# EAGLE board SparkFun_VR_IMU_Breakout_BNO086_QWIIC-Panel (EAGLE 9.6.2), part 1 of 5
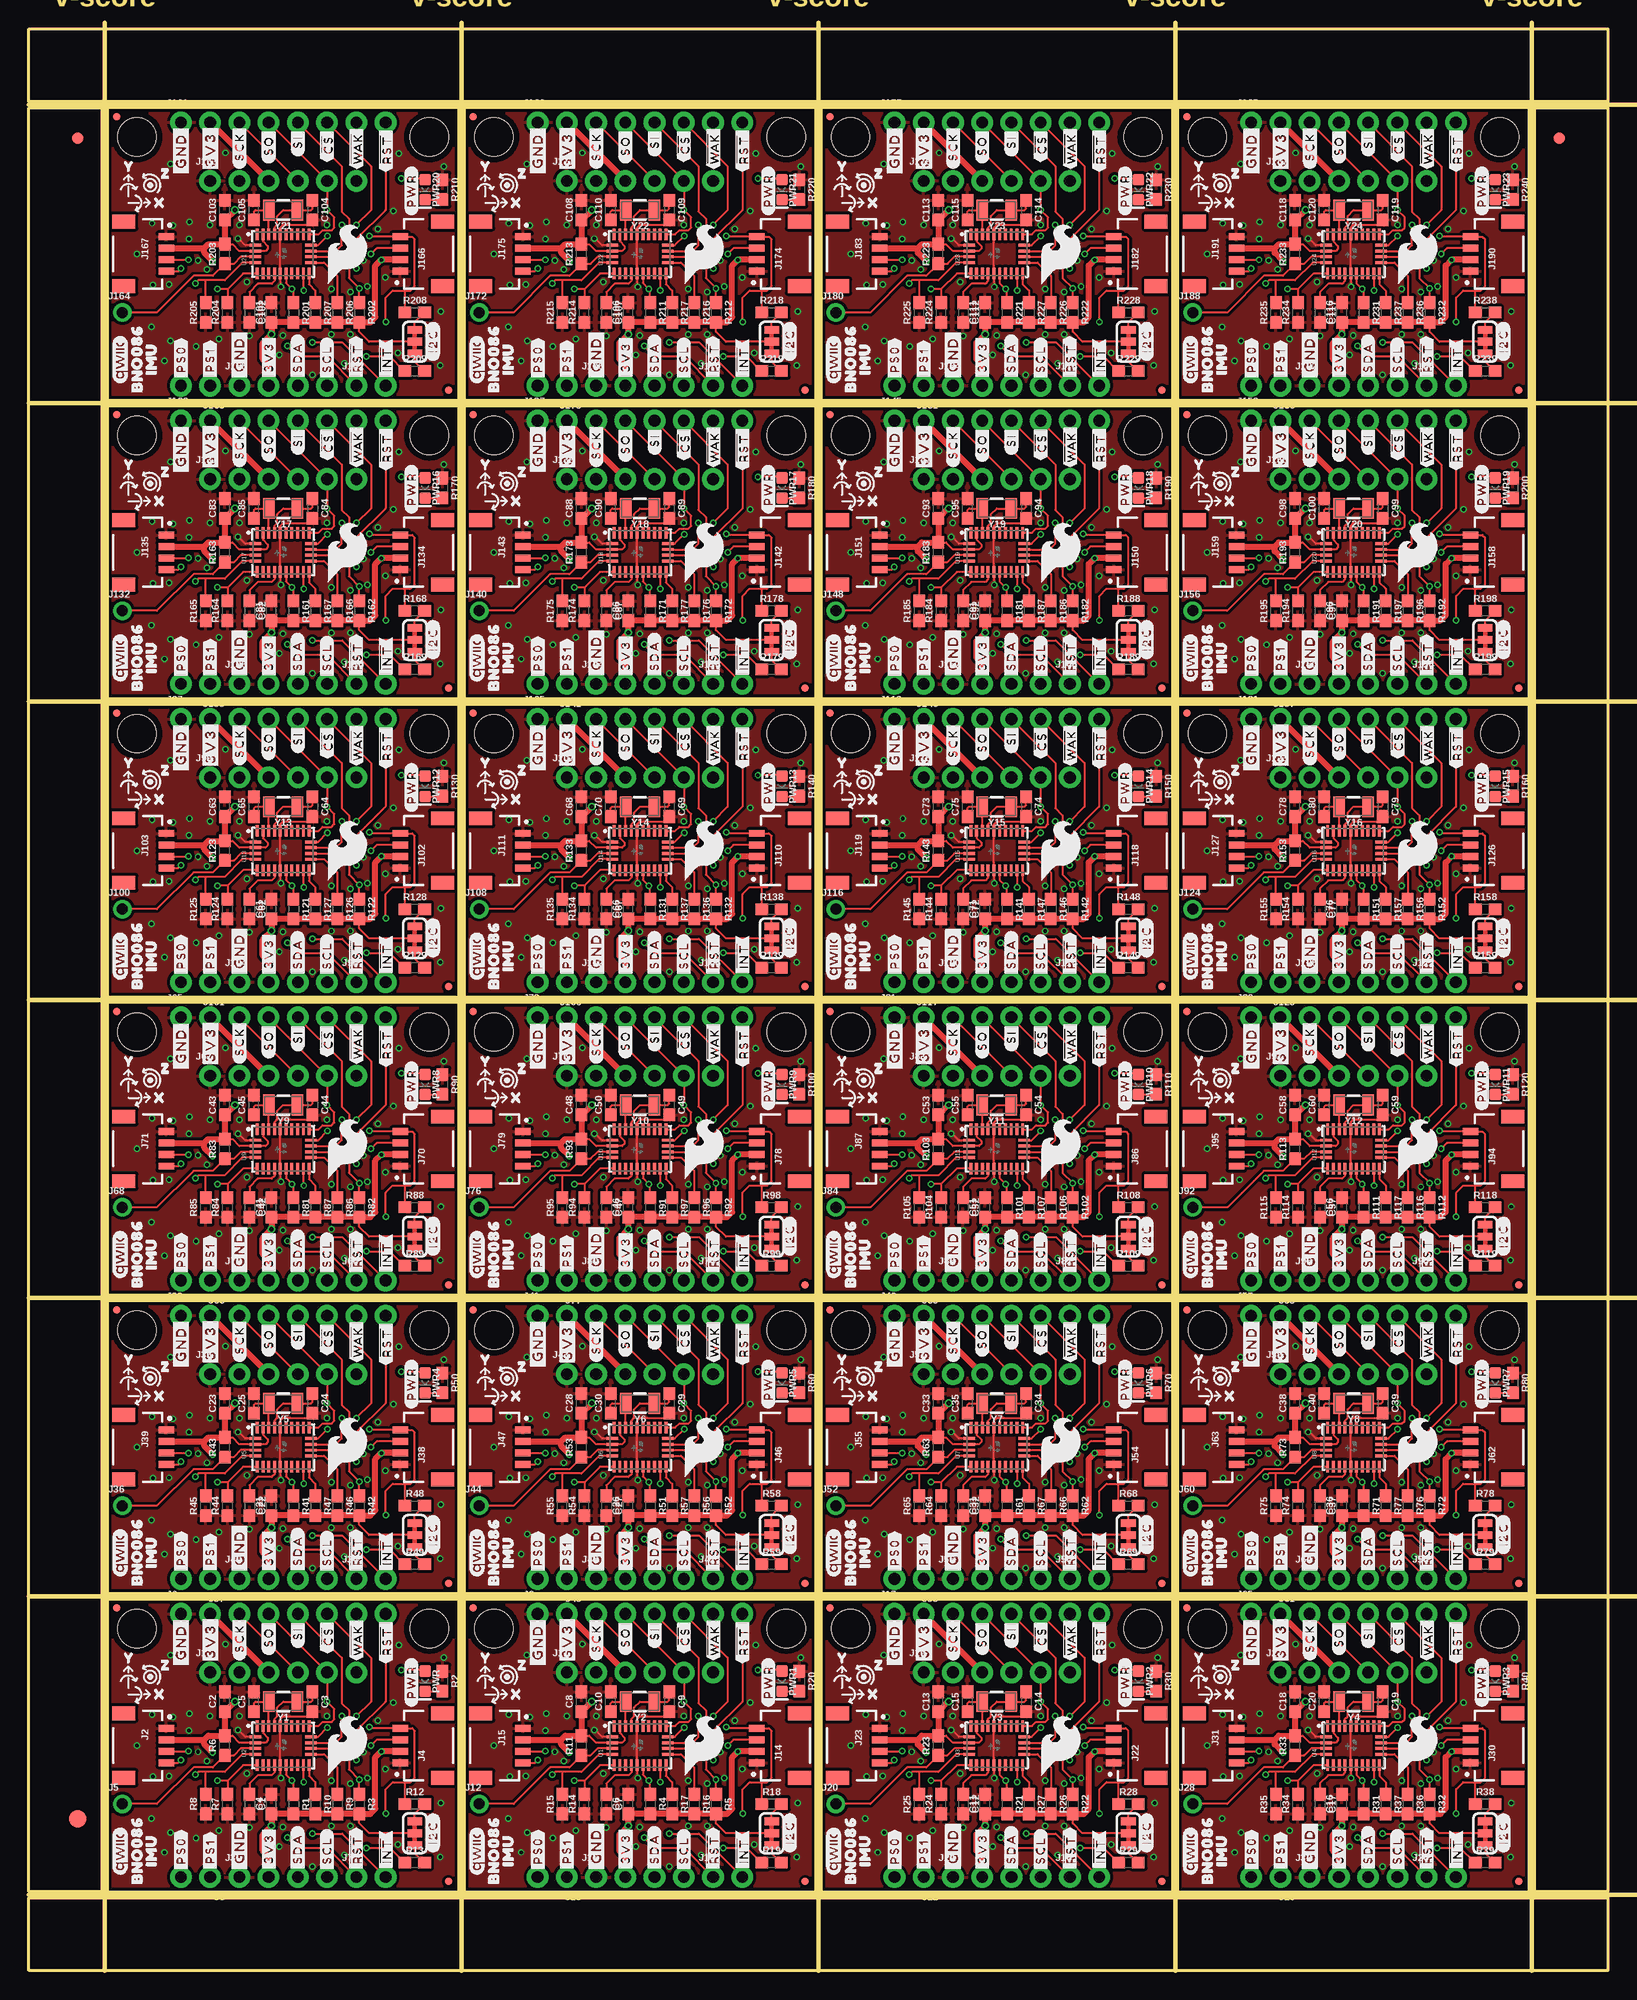
[diagram p0: board, top side]
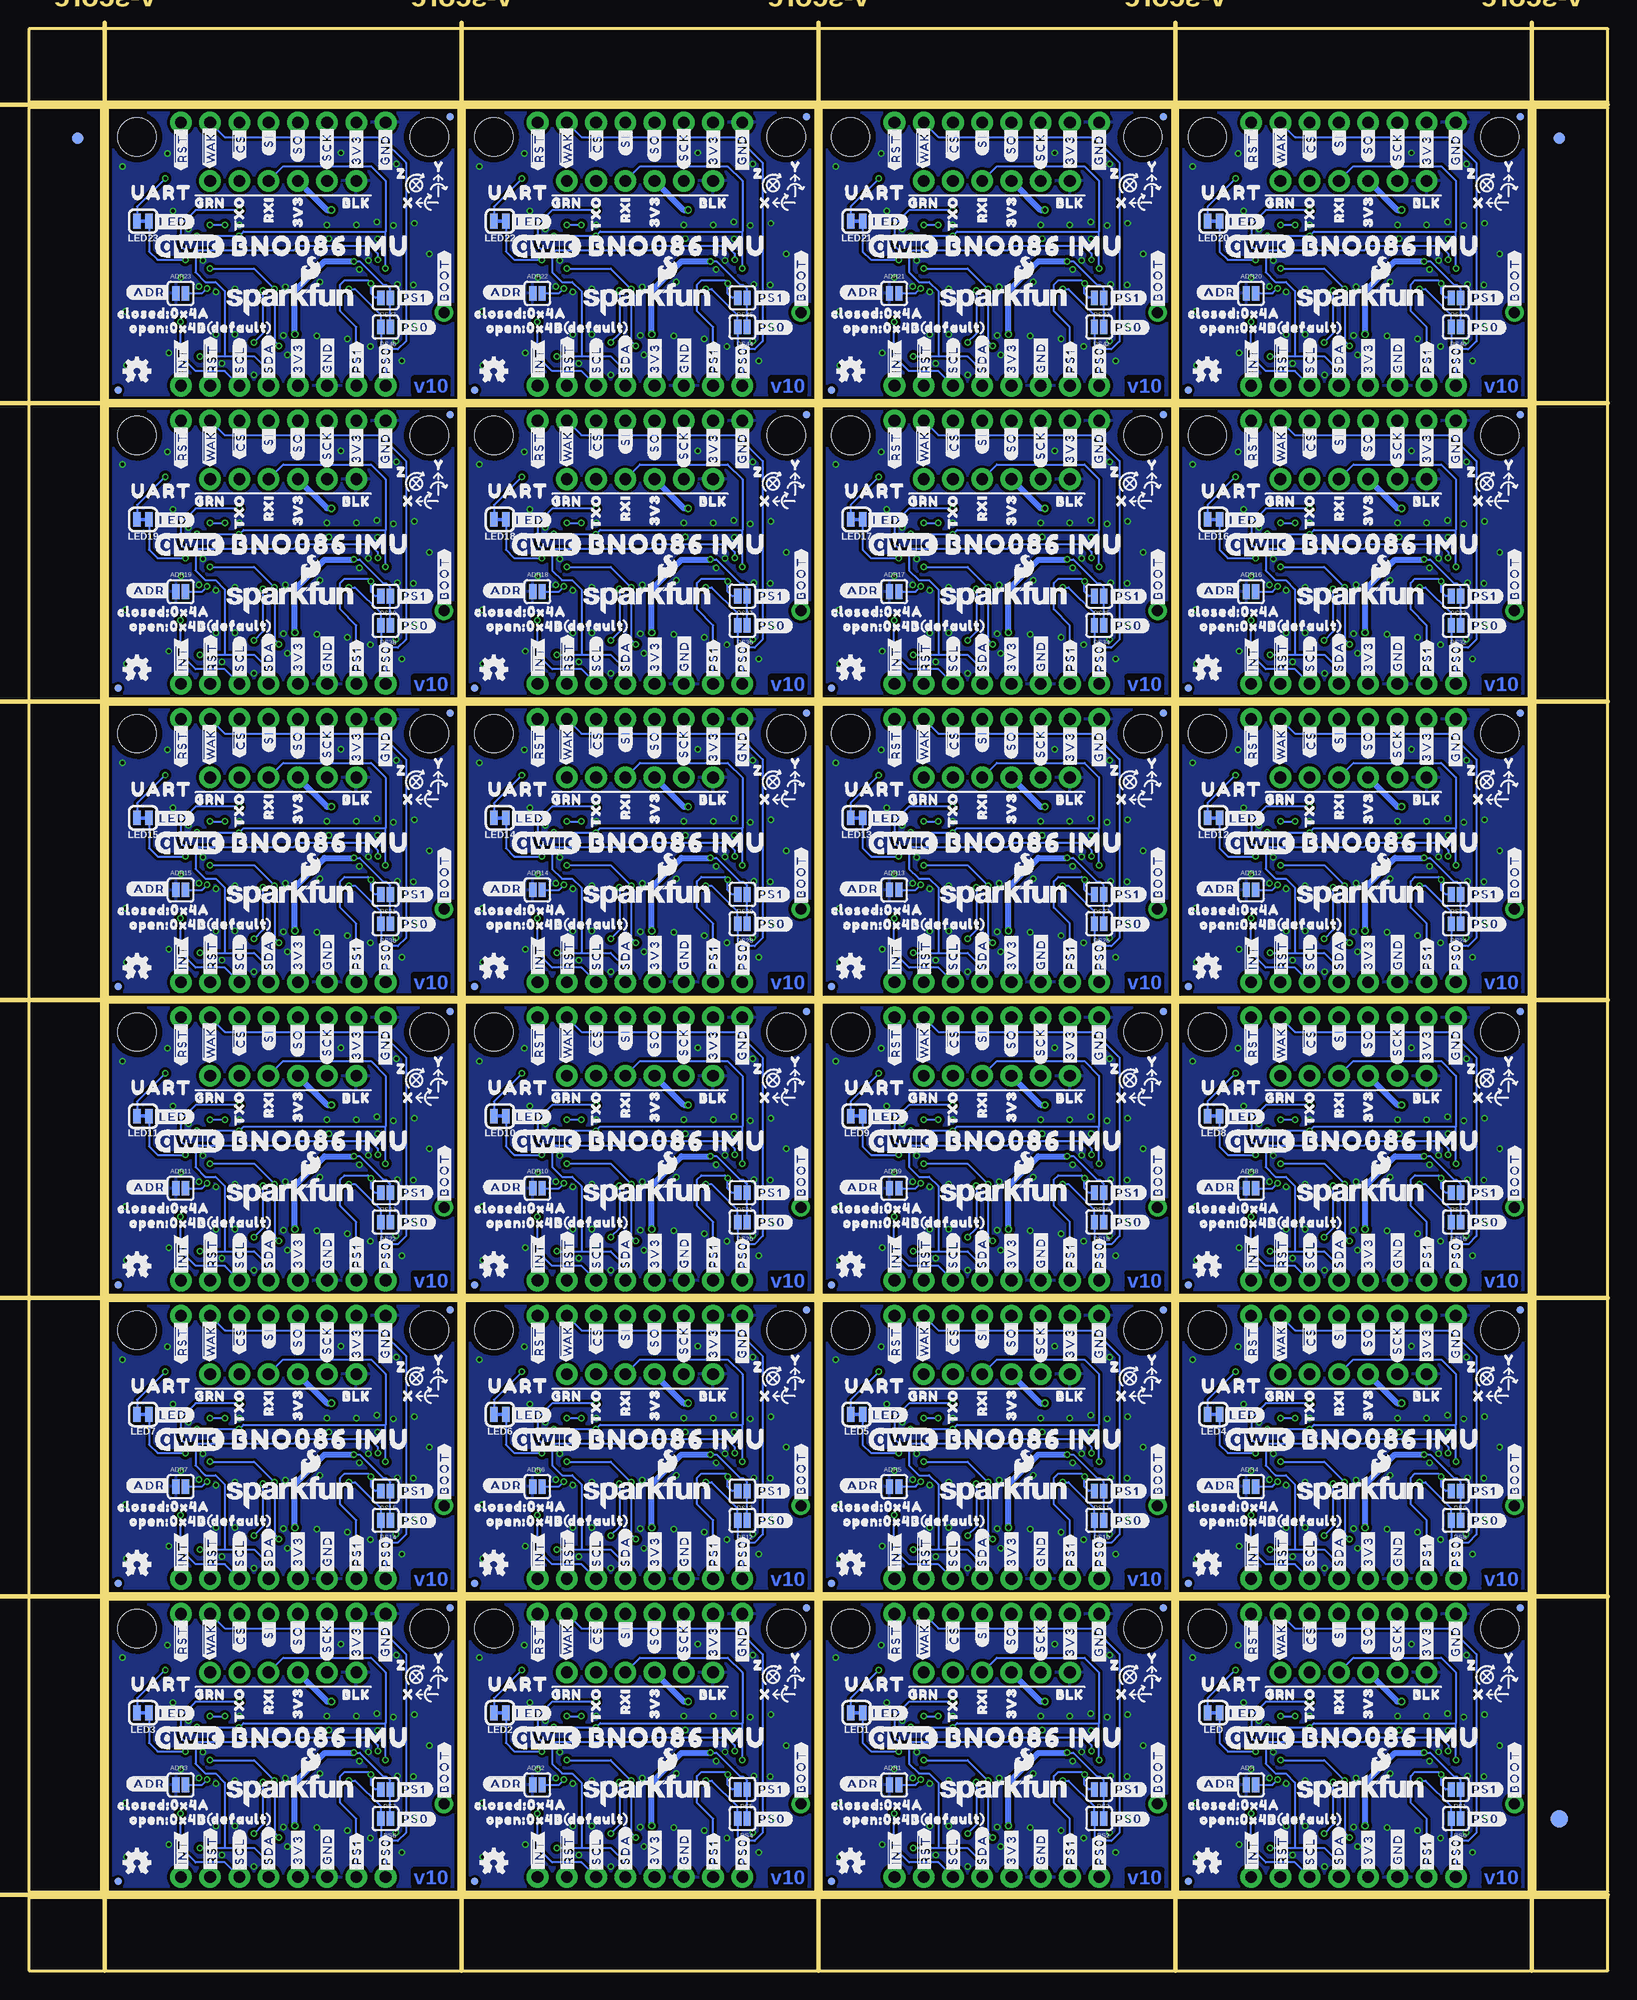
[diagram p1: board, bottom side, seen from below]

Size 137.16 x 168.66 mm. Coordinates in mm from the lower left corner, seen from the top.
Outline: 6.86,6.86 6.86,32.26 37.34,32.26 37.34,6.86 6.86,6.86
Outline: 37.85,6.86 37.85,32.26 68.33,32.26 68.33,6.86 37.85,6.86
Outline: 68.83,6.86 68.83,32.26 99.31,32.26 99.31,6.86 68.83,6.86
Outline: 99.82,6.86 99.82,32.26 130.3,32.26 130.3,6.86 99.82,6.86
Outline: 6.86,32.77 6.86,58.17 37.34,58.17 37.34,32.77 6.86,32.77
Outline: 37.85,32.77 37.85,58.17 68.33,58.17 68.33,32.77 37.85,32.77
Outline: 68.83,32.77 68.83,58.17 99.31,58.17 99.31,32.77 68.83,32.77
Outline: 99.82,32.77 99.82,58.17 130.3,58.17 130.3,32.77 99.82,32.77
Outline: 6.86,58.67 6.86,84.07 37.34,84.07 37.34,58.67 6.86,58.67
Outline: 37.85,58.67 37.85,84.07 68.33,84.07 68.33,58.67 37.85,58.67
Outline: 68.83,58.67 68.83,84.07 99.31,84.07 99.31,58.67 68.83,58.67
Outline: 99.82,58.67 99.82,84.07 130.3,84.07 130.3,58.67 99.82,58.67
Outline: 6.86,84.58 6.86,109.98 37.34,109.98 37.34,84.58 6.86,84.58
Outline: 37.85,84.58 37.85,109.98 68.33,109.98 68.33,84.58 37.85,84.58
Outline: 68.83,84.58 68.83,109.98 99.31,109.98 99.31,84.58 68.83,84.58
Outline: 99.82,84.58 99.82,109.98 130.3,109.98 130.3,84.58 99.82,84.58
Outline: 6.86,110.49 6.86,135.89 37.34,135.89 37.34,110.49 6.86,110.49
Outline: 37.85,110.49 37.85,135.89 68.33,135.89 68.33,110.49 37.85,110.49
Outline: 68.83,110.49 68.83,135.89 99.31,135.89 99.31,110.49 68.83,110.49
Outline: 99.82,110.49 99.82,135.89 130.3,135.89 130.3,110.49 99.82,110.49
Outline: 6.86,136.4 6.86,161.8 37.34,161.8 37.34,136.4 6.86,136.4
Outline: 37.85,136.4 37.85,161.8 68.33,161.8 68.33,136.4 37.85,136.4
Outline: 68.83,136.4 68.83,161.8 99.31,161.8 99.31,136.4 68.83,136.4
Outline: 99.82,136.4 99.82,161.8 130.3,161.8 130.3,136.4 99.82,136.4
Outline: 0,6.35 137.16,6.35 137.16,0 0,0 0,6.35
Outline: 130.81,161.8 137.16,161.8 137.16,6.86 130.81,6.86 130.81,161.8
Outline: 0,168.66 137.16,168.66 137.16,162.31 0,162.31 0,168.66
Outline: 0,161.8 6.35,161.8 6.35,6.86 0,6.86 0,161.8
Copper layers (1*16): Top 0.035mm / dielectric 1.5mm / Bottom 0.035mm
Design rules "SparkFun_VR_IMU_Breakout_BNO086_QWIIC": minimum track width 5mil, minimum drill 0.3mm, track to track 5mil, track to pad 5mil, pad to pad 5mil, via to via 5mil, smd to smd 5mil, copper to edge 7mil, drill to drill 7mil, minimum pad ring 5mil, minimum via ring 5mil, stop-mask expansion 2.5mil, vias tented up to drill 25mil, thermal gap 10mil
Milling: 12 lines

## Footprints (pad centres in the part's own frame; a part is rotated, then mirrored left to right if it is on the bottom)
SMT-JUMPER_2_NO_SILK = smd 0.635 x 1.27: 1 -0.406,0; 2 0.406,0
0603 = smd 1.1 x 1: 1 -0.85,0; 2 0.85,0
FIDUCIAL-1X2 = smd 1 x 1: 1 0,0
FIDUCIAL-1.5X3 = smd 1.5 x 1.5: 1 0,0
SMT-JUMPER_3_2-NC_TRACE_SILK = smd 0.66 x 1.27: 1 -1.041,0; 2 0,0; 3 1.041,0
1X06_NO_SILK = drill 1.016 pad 1.88: 1 0,0; 2 2.54,0; 3 5.08,0; 4 7.62,0; 5 10.16,0; 6 12.7,0
JST04_1MM_RA = smd 0.6 x 1.35: 1 -1.5,0; 2 -0.5,0; 3 0.5,0; 4 1.5,0 | smd 1.2 x 2: NC1 2.8,-3.675; NC2 -2.8,-3.675
1X04_NO_SILK = drill 1.016 pad 1.88: 1 0,0; 2 2.54,0; 3 5.08,0; 4 7.62,0
1X01_NO_SILK = drill 0.95 pad 1.6: 1 0,0
1X08_NO_SILK = drill 1.016 pad 1.88: 1 0,0; 2 2.54,0; 3 5.08,0; 4 7.62,0; 5 10.16,0; 6 12.7,0; 7 15.24,0; 8 17.78,0
1X02_NO_SILK = drill 1.016 pad 1.88: 1 0,0; 2 2.54,0
FIDUCIAL-MICRO = smd 0.635 x 0.635: 1 0,0
STAND-OFF = hole 3.302: 0,0
SMT-JUMPER_2_NC_TRACE_SILK = smd 0.66 x 1.27: 1 -0.521,0; 2 0.521,0
LED-0603 = smd 1 x 1: A -0.877,0; C 0.877,0
LGA-28 = smd 1 x 0.25: 1 1.7,2.25; 6 -1.7,2.25; 7 -1.7,1.75; 8 -1.7,1.25; 9 -1.7,0.75; 10 -1.7,0.25; 11 -1.7,-0.25; 12 -1.7,-0.75; 13 -1.7,-1.25; 14 -1.7,-1.75; 15 -1.7,-2.25; 20 1.7,-2.25; 21 1.7,-1.75; 22 1.7,-1.25; 23 1.7,-0.75; 24 1.7,-0.25; 25 1.7,0.25; 26 1.7,0.75; 27 1.7,1.25; 28 1.7,1.75 | smd 0.25 x 1: 2 0.75,2.4; 3 0.25,2.4; 4 -0.25,2.4; 5 -0.75,2.4; 16 -0.75,-2.4; 17 -0.25,-2.4; 18 0.25,-2.4; 19 0.75,-2.4
CRYSTAL-SMD-3.2X1.5MM = smd 1 x 1.8: P$1 -1.25,0; P$2 1.25,0

## Placement (x,y rotation side)
ADR  [SMT-JUMPER_2_NO_SILK]  31,16.14 0 bottom
ADR1  [SMT-JUMPER_2_NO_SILK]  61.99,16.14 0 bottom
ADR2  [SMT-JUMPER_2_NO_SILK]  92.98,16.14 0 bottom
ADR3  [SMT-JUMPER_2_NO_SILK]  123.97,16.14 0 bottom
ADR4  [SMT-JUMPER_2_NO_SILK]  31,42.05 0 bottom
ADR5  [SMT-JUMPER_2_NO_SILK]  61.99,42.05 0 bottom
ADR6  [SMT-JUMPER_2_NO_SILK]  92.98,42.05 0 bottom
ADR7  [SMT-JUMPER_2_NO_SILK]  123.97,42.05 0 bottom
ADR8  [SMT-JUMPER_2_NO_SILK]  31,67.96 0 bottom
ADR9  [SMT-JUMPER_2_NO_SILK]  61.99,67.96 0 bottom
ADR10  [SMT-JUMPER_2_NO_SILK]  92.98,67.96 0 bottom
ADR11  [SMT-JUMPER_2_NO_SILK]  123.97,67.96 0 bottom
ADR12  [SMT-JUMPER_2_NO_SILK]  31,93.87 0 bottom
ADR13  [SMT-JUMPER_2_NO_SILK]  61.99,93.87 0 bottom
ADR14  [SMT-JUMPER_2_NO_SILK]  92.98,93.87 0 bottom
ADR15  [SMT-JUMPER_2_NO_SILK]  123.97,93.87 0 bottom
ADR16  [SMT-JUMPER_2_NO_SILK]  31,119.77 0 bottom
ADR17  [SMT-JUMPER_2_NO_SILK]  61.99,119.77 0 bottom
ADR18  [SMT-JUMPER_2_NO_SILK]  92.98,119.77 0 bottom
ADR19  [SMT-JUMPER_2_NO_SILK]  123.97,119.77 0 bottom
ADR20  [SMT-JUMPER_2_NO_SILK]  31,145.68 0 bottom
ADR21  [SMT-JUMPER_2_NO_SILK]  61.99,145.68 0 bottom
ADR22  [SMT-JUMPER_2_NO_SILK]  92.98,145.68 0 bottom
ADR23  [SMT-JUMPER_2_NO_SILK]  123.97,145.68 0 bottom
C1  0.1uF  [0603]  19.18,14.48 270 top
C2  0.1uF  [0603]  17.02,23.37 90 top
C3  22pF  [0603]  24.64,23.37 270 top
C4  0.1uF  [0603]  21.08,14.48 90 top
C5  22pF  [0603]  19.56,23.37 90 top
C6  0.1uF  [0603]  52.07,14.48 90 top
C7  0.1uF  [0603]  50.16,14.48 270 top
C8  0.1uF  [0603]  48.01,23.37 90 top
C9  22pF  [0603]  55.63,23.37 270 top
C10  22pF  [0603]  50.55,23.37 90 top
C11  0.1uF  [0603]  83.06,14.48 90 top
C12  0.1uF  [0603]  81.15,14.48 270 top
C13  0.1uF  [0603]  78.99,23.37 90 top
C14  22pF  [0603]  86.61,23.37 270 top
C15  22pF  [0603]  81.53,23.37 90 top
C16  0.1uF  [0603]  114.05,14.48 90 top
C17  0.1uF  [0603]  112.14,14.48 270 top
C18  0.1uF  [0603]  109.98,23.37 90 top
C19  22pF  [0603]  117.6,23.37 270 top
C20  22pF  [0603]  112.52,23.37 90 top
C21  0.1uF  [0603]  21.08,40.39 90 top
C22  0.1uF  [0603]  19.18,40.39 270 top
C23  0.1uF  [0603]  17.02,49.28 90 top
C24  22pF  [0603]  24.64,49.28 270 top
C25  22pF  [0603]  19.56,49.28 90 top
C26  0.1uF  [0603]  52.07,40.39 90 top
C27  0.1uF  [0603]  50.16,40.39 270 top
C28  0.1uF  [0603]  48.01,49.28 90 top
C29  22pF  [0603]  55.63,49.28 270 top
C30  22pF  [0603]  50.55,49.28 90 top
C31  0.1uF  [0603]  83.06,40.39 90 top
C32  0.1uF  [0603]  81.15,40.39 270 top
C33  0.1uF  [0603]  78.99,49.28 90 top
C34  22pF  [0603]  86.61,49.28 270 top
C35  22pF  [0603]  81.53,49.28 90 top
C36  0.1uF  [0603]  114.05,40.39 90 top
C37  0.1uF  [0603]  112.14,40.39 270 top
C38  0.1uF  [0603]  109.98,49.28 90 top
C39  22pF  [0603]  117.6,49.28 270 top
C40  22pF  [0603]  112.52,49.28 90 top
C41  0.1uF  [0603]  21.08,66.29 90 top
C42  0.1uF  [0603]  19.18,66.29 270 top
C43  0.1uF  [0603]  17.02,75.18 90 top
C44  22pF  [0603]  24.64,75.18 270 top
C45  22pF  [0603]  19.56,75.18 90 top
C46  0.1uF  [0603]  52.07,66.29 90 top
C47  0.1uF  [0603]  50.16,66.29 270 top
C48  0.1uF  [0603]  48.01,75.18 90 top
C49  22pF  [0603]  55.63,75.18 270 top
C50  22pF  [0603]  50.55,75.18 90 top
C51  0.1uF  [0603]  83.06,66.29 90 top
C52  0.1uF  [0603]  81.15,66.29 270 top
C53  0.1uF  [0603]  78.99,75.18 90 top
C54  22pF  [0603]  86.61,75.18 270 top
C55  22pF  [0603]  81.53,75.18 90 top
C56  0.1uF  [0603]  114.05,66.29 90 top
C57  0.1uF  [0603]  112.14,66.29 270 top
C58  0.1uF  [0603]  109.98,75.18 90 top
C59  22pF  [0603]  117.6,75.18 270 top
C60  22pF  [0603]  112.52,75.18 90 top
C61  0.1uF  [0603]  21.08,92.2 90 top
C62  0.1uF  [0603]  19.18,92.2 270 top
C63  0.1uF  [0603]  17.02,101.09 90 top
C64  22pF  [0603]  24.64,101.09 270 top
C65  22pF  [0603]  19.56,101.09 90 top
C66  0.1uF  [0603]  52.07,92.2 90 top
C67  0.1uF  [0603]  50.16,92.2 270 top
C68  0.1uF  [0603]  48.01,101.09 90 top
C69  22pF  [0603]  55.63,101.09 270 top
C70  22pF  [0603]  50.55,101.09 90 top
C71  0.1uF  [0603]  83.06,92.2 90 top
C72  0.1uF  [0603]  81.15,92.2 270 top
C73  0.1uF  [0603]  78.99,101.09 90 top
C74  22pF  [0603]  86.61,101.09 270 top
C75  22pF  [0603]  81.53,101.09 90 top
C76  0.1uF  [0603]  114.05,92.2 90 top
C77  0.1uF  [0603]  112.14,92.2 270 top
C78  0.1uF  [0603]  109.98,101.09 90 top
C79  22pF  [0603]  117.6,101.09 270 top
C80  22pF  [0603]  112.52,101.09 90 top
C81  0.1uF  [0603]  21.08,118.11 90 top
C82  0.1uF  [0603]  19.18,118.11 270 top
C83  0.1uF  [0603]  17.02,127 90 top
C84  22pF  [0603]  24.64,127 270 top
C85  22pF  [0603]  19.56,127 90 top
C86  0.1uF  [0603]  52.07,118.11 90 top
C87  0.1uF  [0603]  50.16,118.11 270 top
C88  0.1uF  [0603]  48.01,127 90 top
C89  22pF  [0603]  55.63,127 270 top
C90  22pF  [0603]  50.55,127 90 top
C91  0.1uF  [0603]  83.06,118.11 90 top
C92  0.1uF  [0603]  81.15,118.11 270 top
C93  0.1uF  [0603]  78.99,127 90 top
C94  22pF  [0603]  86.61,127 270 top
C95  22pF  [0603]  81.53,127 90 top
C96  0.1uF  [0603]  114.05,118.11 90 top
C97  0.1uF  [0603]  112.14,118.11 270 top
C98  0.1uF  [0603]  109.98,127 90 top
C99  22pF  [0603]  117.6,127 270 top
C100  22pF  [0603]  112.52,127 90 top
C101  0.1uF  [0603]  21.08,144.02 90 top
C102  0.1uF  [0603]  19.18,144.02 270 top
C103  0.1uF  [0603]  17.02,152.91 90 top
C104  22pF  [0603]  24.64,152.91 270 top
C105  22pF  [0603]  19.56,152.91 90 top
C106  0.1uF  [0603]  52.07,144.02 90 top
C107  0.1uF  [0603]  50.16,144.02 270 top
C108  0.1uF  [0603]  48.01,152.91 90 top
C109  22pF  [0603]  55.63,152.91 270 top
C110  22pF  [0603]  50.55,152.91 90 top
C111  0.1uF  [0603]  83.06,144.02 90 top
C112  0.1uF  [0603]  81.15,144.02 270 top
C113  0.1uF  [0603]  78.99,152.91 90 top
C114  22pF  [0603]  86.61,152.91 270 top
C115  22pF  [0603]  81.53,152.91 90 top
C116  0.1uF  [0603]  114.05,144.02 90 top
C117  0.1uF  [0603]  112.14,144.02 270 top
C118  0.1uF  [0603]  109.98,152.91 90 top
C119  22pF  [0603]  117.6,152.91 270 top
C120  22pF  [0603]  112.52,152.91 90 top
E$1  [FIDUCIAL-1X2]  4.23,159.13 0 top
E$2  [FIDUCIAL-1X2]  4.23,159.13 0 bottom
E$3  [FIDUCIAL-1X2]  132.93,159.13 0 top
E$4  [FIDUCIAL-1X2]  132.93,159.13 0 bottom
E$5  [FIDUCIAL-1.5X3]  4.23,13.21 0 top
E$6  [FIDUCIAL-1.5X3]  4.23,13.21 0 bottom
I2C  [SMT-JUMPER_3_2-NC_TRACE_SILK]  33.53,11.94 270 top
I2C1  [SMT-JUMPER_3_2-NC_TRACE_SILK]  64.52,11.94 270 top
I2C2  [SMT-JUMPER_3_2-NC_TRACE_SILK]  95.5,11.94 270 top
I2C3  [SMT-JUMPER_3_2-NC_TRACE_SILK]  126.49,11.94 270 top
I2C4  [SMT-JUMPER_3_2-NC_TRACE_SILK]  33.53,37.85 270 top
I2C5  [SMT-JUMPER_3_2-NC_TRACE_SILK]  64.52,37.85 270 top
I2C6  [SMT-JUMPER_3_2-NC_TRACE_SILK]  95.5,37.85 270 top
I2C7  [SMT-JUMPER_3_2-NC_TRACE_SILK]  126.49,37.85 270 top
I2C8  [SMT-JUMPER_3_2-NC_TRACE_SILK]  33.53,63.75 270 top
I2C9  [SMT-JUMPER_3_2-NC_TRACE_SILK]  64.52,63.75 270 top
I2C10  [SMT-JUMPER_3_2-NC_TRACE_SILK]  95.5,63.75 270 top
I2C11  [SMT-JUMPER_3_2-NC_TRACE_SILK]  126.49,63.75 270 top
I2C12  [SMT-JUMPER_3_2-NC_TRACE_SILK]  33.53,89.66 270 top
I2C13  [SMT-JUMPER_3_2-NC_TRACE_SILK]  64.52,89.66 270 top
I2C14  [SMT-JUMPER_3_2-NC_TRACE_SILK]  95.5,89.66 270 top
I2C15  [SMT-JUMPER_3_2-NC_TRACE_SILK]  126.49,89.66 270 top
I2C16  [SMT-JUMPER_3_2-NC_TRACE_SILK]  33.53,115.57 270 top
I2C17  [SMT-JUMPER_3_2-NC_TRACE_SILK]  64.52,115.57 270 top
I2C18  [SMT-JUMPER_3_2-NC_TRACE_SILK]  95.5,115.57 270 top
I2C19  [SMT-JUMPER_3_2-NC_TRACE_SILK]  126.49,115.57 270 top
I2C20  [SMT-JUMPER_3_2-NC_TRACE_SILK]  33.53,141.48 270 top
I2C21  [SMT-JUMPER_3_2-NC_TRACE_SILK]  64.52,141.48 270 top
I2C22  [SMT-JUMPER_3_2-NC_TRACE_SILK]  95.5,141.48 270 top
I2C23  [SMT-JUMPER_3_2-NC_TRACE_SILK]  126.49,141.48 270 top
J1  [1X06_NO_SILK]  15.75,25.91 0 top
J2  SMD  [JST04_1MM_RA]  11.94,19.56 270 top
J3  PTH  [1X04_NO_SILK]  18.29,8.13 0 top
J4  SMD  [JST04_1MM_RA]  32.26,19.56 90 top
J5  [1X01_NO_SILK]  8.13,14.48 0 top
J6  SPI  [1X08_NO_SILK]  13.21,30.99 0 top
J7  [1X02_NO_SILK]  28.45,8.13 0 top
J8  [1X02_NO_SILK]  15.75,8.13 180 top
J9  SPI  [1X08_NO_SILK]  44.2,30.99 0 top
J10  [1X02_NO_SILK]  59.44,8.13 0 top
J11  [1X06_NO_SILK]  46.74,25.91 0 top
J12  [1X01_NO_SILK]  39.12,14.48 0 top
J13  [1X02_NO_SILK]  46.74,8.13 180 top
J14  SMD  [JST04_1MM_RA]  63.25,19.56 90 top
J15  SMD  [JST04_1MM_RA]  42.93,19.56 270 top
J16  PTH  [1X04_NO_SILK]  49.28,8.13 0 top
J17  SPI  [1X08_NO_SILK]  75.18,30.99 0 top
J18  [1X02_NO_SILK]  90.42,8.13 0 top
J19  [1X06_NO_SILK]  77.72,25.91 0 top
J20  [1X01_NO_SILK]  70.1,14.48 0 top
J21  [1X02_NO_SILK]  77.72,8.13 180 top
J22  SMD  [JST04_1MM_RA]  94.23,19.56 90 top
J23  SMD  [JST04_1MM_RA]  73.91,19.56 270 top
J24  PTH  [1X04_NO_SILK]  80.26,8.13 0 top
J25  SPI  [1X08_NO_SILK]  106.17,30.99 0 top
J26  [1X02_NO_SILK]  121.41,8.13 0 top
J27  [1X06_NO_SILK]  108.71,25.91 0 top
J28  [1X01_NO_SILK]  101.09,14.48 0 top
J29  [1X02_NO_SILK]  108.71,8.13 180 top
J30  SMD  [JST04_1MM_RA]  125.22,19.56 90 top
J31  SMD  [JST04_1MM_RA]  104.9,19.56 270 top
J32  PTH  [1X04_NO_SILK]  111.25,8.13 0 top
J33  SPI  [1X08_NO_SILK]  13.21,56.9 0 top
J34  [1X02_NO_SILK]  28.45,34.04 0 top
J35  [1X06_NO_SILK]  15.75,51.82 0 top
J36  [1X01_NO_SILK]  8.13,40.39 0 top
J37  [1X02_NO_SILK]  15.75,34.04 180 top
J38  SMD  [JST04_1MM_RA]  32.26,45.47 90 top
J39  SMD  [JST04_1MM_RA]  11.94,45.47 270 top
J40  PTH  [1X04_NO_SILK]  18.29,34.04 0 top
J41  SPI  [1X08_NO_SILK]  44.2,56.9 0 top
J42  [1X02_NO_SILK]  59.44,34.04 0 top
J43  [1X06_NO_SILK]  46.74,51.82 0 top
J44  [1X01_NO_SILK]  39.12,40.39 0 top
J45  [1X02_NO_SILK]  46.74,34.04 180 top
J46  SMD  [JST04_1MM_RA]  63.25,45.47 90 top
J47  SMD  [JST04_1MM_RA]  42.93,45.47 270 top
J48  PTH  [1X04_NO_SILK]  49.28,34.04 0 top
J49  SPI  [1X08_NO_SILK]  75.18,56.9 0 top
J50  [1X02_NO_SILK]  90.42,34.04 0 top
J51  [1X06_NO_SILK]  77.72,51.82 0 top
J52  [1X01_NO_SILK]  70.1,40.39 0 top
J53  [1X02_NO_SILK]  77.72,34.04 180 top
J54  SMD  [JST04_1MM_RA]  94.23,45.47 90 top
J55  SMD  [JST04_1MM_RA]  73.91,45.47 270 top
J56  PTH  [1X04_NO_SILK]  80.26,34.04 0 top
J57  SPI  [1X08_NO_SILK]  106.17,56.9 0 top
J58  [1X02_NO_SILK]  121.41,34.04 0 top
J59  [1X06_NO_SILK]  108.71,51.82 0 top
J60  [1X01_NO_SILK]  101.09,40.39 0 top
J61  [1X02_NO_SILK]  108.71,34.04 180 top
J62  SMD  [JST04_1MM_RA]  125.22,45.47 90 top
J63  SMD  [JST04_1MM_RA]  104.9,45.47 270 top
J64  PTH  [1X04_NO_SILK]  111.25,34.04 0 top
J65  SPI  [1X08_NO_SILK]  13.21,82.8 0 top
J66  [1X02_NO_SILK]  28.45,59.94 0 top
J67  [1X06_NO_SILK]  15.75,77.72 0 top
J68  [1X01_NO_SILK]  8.13,66.29 0 top
J69  [1X02_NO_SILK]  15.75,59.94 180 top
J70  SMD  [JST04_1MM_RA]  32.26,71.37 90 top
J71  SMD  [JST04_1MM_RA]  11.94,71.37 270 top
J72  PTH  [1X04_NO_SILK]  18.29,59.94 0 top
J73  SPI  [1X08_NO_SILK]  44.2,82.8 0 top
J74  [1X02_NO_SILK]  59.44,59.94 0 top
J75  [1X06_NO_SILK]  46.74,77.72 0 top
J76  [1X01_NO_SILK]  39.12,66.29 0 top
J77  [1X02_NO_SILK]  46.74,59.94 180 top
J78  SMD  [JST04_1MM_RA]  63.25,71.37 90 top
J79  SMD  [JST04_1MM_RA]  42.93,71.37 270 top
J80  PTH  [1X04_NO_SILK]  49.28,59.94 0 top
J81  SPI  [1X08_NO_SILK]  75.18,82.8 0 top
J82  [1X02_NO_SILK]  90.42,59.94 0 top
J83  [1X06_NO_SILK]  77.72,77.72 0 top
J84  [1X01_NO_SILK]  70.1,66.29 0 top
J85  [1X02_NO_SILK]  77.72,59.94 180 top
J86  SMD  [JST04_1MM_RA]  94.23,71.37 90 top
J87  SMD  [JST04_1MM_RA]  73.91,71.37 270 top
J88  PTH  [1X04_NO_SILK]  80.26,59.94 0 top
J89  SPI  [1X08_NO_SILK]  106.17,82.8 0 top
J90  [1X02_NO_SILK]  121.41,59.94 0 top
J91  [1X06_NO_SILK]  108.71,77.72 0 top
J92  [1X01_NO_SILK]  101.09,66.29 0 top
J93  [1X02_NO_SILK]  108.71,59.94 180 top
J94  SMD  [JST04_1MM_RA]  125.22,71.37 90 top
J95  SMD  [JST04_1MM_RA]  104.9,71.37 270 top
J96  PTH  [1X04_NO_SILK]  111.25,59.94 0 top
J97  SPI  [1X08_NO_SILK]  13.21,108.71 0 top
J98  [1X02_NO_SILK]  28.45,85.85 0 top
J99  [1X06_NO_SILK]  15.75,103.63 0 top
J100  [1X01_NO_SILK]  8.13,92.2 0 top
J101  [1X02_NO_SILK]  15.75,85.85 180 top
J102  SMD  [JST04_1MM_RA]  32.26,97.28 90 top
J103  SMD  [JST04_1MM_RA]  11.94,97.28 270 top
J104  PTH  [1X04_NO_SILK]  18.29,85.85 0 top
J105  SPI  [1X08_NO_SILK]  44.2,108.71 0 top
J106  [1X02_NO_SILK]  59.44,85.85 0 top
J107  [1X06_NO_SILK]  46.74,103.63 0 top
J108  [1X01_NO_SILK]  39.12,92.2 0 top
J109  [1X02_NO_SILK]  46.74,85.85 180 top
J110  SMD  [JST04_1MM_RA]  63.25,97.28 90 top
J111  SMD  [JST04_1MM_RA]  42.93,97.28 270 top
J112  PTH  [1X04_NO_SILK]  49.28,85.85 0 top
J113  SPI  [1X08_NO_SILK]  75.18,108.71 0 top
J114  [1X02_NO_SILK]  90.42,85.85 0 top
J115  [1X06_NO_SILK]  77.72,103.63 0 top
J116  [1X01_NO_SILK]  70.1,92.2 0 top
J117  [1X02_NO_SILK]  77.72,85.85 180 top
J118  SMD  [JST04_1MM_RA]  94.23,97.28 90 top
J119  SMD  [JST04_1MM_RA]  73.91,97.28 270 top
J120  PTH  [1X04_NO_SILK]  80.26,85.85 0 top
J121  SPI  [1X08_NO_SILK]  106.17,108.71 0 top
J122  [1X02_NO_SILK]  121.41,85.85 0 top
J123  [1X06_NO_SILK]  108.71,103.63 0 top
J124  [1X01_NO_SILK]  101.09,92.2 0 top
J125  [1X02_NO_SILK]  108.71,85.85 180 top
J126  SMD  [JST04_1MM_RA]  125.22,97.28 90 top
J127  SMD  [JST04_1MM_RA]  104.9,97.28 270 top
J128  PTH  [1X04_NO_SILK]  111.25,85.85 0 top
J129  SPI  [1X08_NO_SILK]  13.21,134.62 0 top
J130  [1X02_NO_SILK]  28.45,111.76 0 top
J131  [1X06_NO_SILK]  15.75,129.54 0 top
J132  [1X01_NO_SILK]  8.13,118.11 0 top
J133  [1X02_NO_SILK]  15.75,111.76 180 top
J134  SMD  [JST04_1MM_RA]  32.26,123.19 90 top
J135  SMD  [JST04_1MM_RA]  11.94,123.19 270 top
J136  PTH  [1X04_NO_SILK]  18.29,111.76 0 top
J137  SPI  [1X08_NO_SILK]  44.2,134.62 0 top
J138  [1X02_NO_SILK]  59.44,111.76 0 top
J139  [1X06_NO_SILK]  46.74,129.54 0 top
J140  [1X01_NO_SILK]  39.12,118.11 0 top
J141  [1X02_NO_SILK]  46.74,111.76 180 top
J142  SMD  [JST04_1MM_RA]  63.25,123.19 90 top
J143  SMD  [JST04_1MM_RA]  42.93,123.19 270 top
J144  PTH  [1X04_NO_SILK]  49.28,111.76 0 top
J145  SPI  [1X08_NO_SILK]  75.18,134.62 0 top
J146  [1X02_NO_SILK]  90.42,111.76 0 top
J147  [1X06_NO_SILK]  77.72,129.54 0 top
J148  [1X01_NO_SILK]  70.1,118.11 0 top
J149  [1X02_NO_SILK]  77.72,111.76 180 top
J150  SMD  [JST04_1MM_RA]  94.23,123.19 90 top
J151  SMD  [JST04_1MM_RA]  73.91,123.19 270 top
J152  PTH  [1X04_NO_SILK]  80.26,111.76 0 top
J153  SPI  [1X08_NO_SILK]  106.17,134.62 0 top
J154  [1X02_NO_SILK]  121.41,111.76 0 top
J155  [1X06_NO_SILK]  108.71,129.54 0 top
J156  [1X01_NO_SILK]  101.09,118.11 0 top
J157  [1X02_NO_SILK]  108.71,111.76 180 top
J158  SMD  [JST04_1MM_RA]  125.22,123.19 90 top
J159  SMD  [JST04_1MM_RA]  104.9,123.19 270 top
J160  PTH  [1X04_NO_SILK]  111.25,111.76 0 top
J161  SPI  [1X08_NO_SILK]  13.21,160.53 0 top
J162  [1X02_NO_SILK]  28.45,137.67 0 top
J163  [1X06_NO_SILK]  15.75,155.45 0 top
J164  [1X01_NO_SILK]  8.13,144.02 0 top
J165  [1X02_NO_SILK]  15.75,137.67 180 top
J166  SMD  [JST04_1MM_RA]  32.26,149.1 90 top
J167  SMD  [JST04_1MM_RA]  11.94,149.1 270 top
J168  PTH  [1X04_NO_SILK]  18.29,137.67 0 top
J169  SPI  [1X08_NO_SILK]  44.2,160.53 0 top
J170  [1X02_NO_SILK]  59.44,137.67 0 top
J171  [1X06_NO_SILK]  46.74,155.45 0 top
J172  [1X01_NO_SILK]  39.12,144.02 0 top
J173  [1X02_NO_SILK]  46.74,137.67 180 top
J174  SMD  [JST04_1MM_RA]  63.25,149.1 90 top
J175  SMD  [JST04_1MM_RA]  42.93,149.1 270 top
J176  PTH  [1X04_NO_SILK]  49.28,137.67 0 top
J177  SPI  [1X08_NO_SILK]  75.18,160.53 0 top
J178  [1X02_NO_SILK]  90.42,137.67 0 top
J179  [1X06_NO_SILK]  77.72,155.45 0 top
J180  [1X01_NO_SILK]  70.1,144.02 0 top
J181  [1X02_NO_SILK]  77.72,137.67 180 top
J182  SMD  [JST04_1MM_RA]  94.23,149.1 90 top
J183  SMD  [JST04_1MM_RA]  73.91,149.1 270 top
J184  PTH  [1X04_NO_SILK]  80.26,137.67 0 top
J185  SPI  [1X08_NO_SILK]  106.17,160.53 0 top
J186  [1X02_NO_SILK]  121.41,137.67 0 top
J187  [1X06_NO_SILK]  108.71,155.45 0 top
J188  [1X01_NO_SILK]  101.09,144.02 0 top
J189  [1X02_NO_SILK]  108.71,137.67 180 top
J190  SMD  [JST04_1MM_RA]  125.22,149.1 90 top
J191  SMD  [JST04_1MM_RA]  104.9,149.1 270 top
J192  PTH  [1X04_NO_SILK]  111.25,137.67 0 top
JP1  FIDUCIALUFIDUCIAL  [FIDUCIAL-MICRO]  36.45,7.75 0 bottom
JP2  FIDUCIALUFIDUCIAL  [FIDUCIAL-MICRO]  36.45,7.75 0 top
JP3  STAND-OFF  [STAND-OFF]  9.4,29.72 0 top
JP4  STAND-OFF  [STAND-OFF]  34.8,29.72 0 top
JP5  FIDUCIALUFIDUCIAL  [FIDUCIAL-MICRO]  7.62,31.5 0 bottom
JP6  FIDUCIALUFIDUCIAL  [FIDUCIAL-MICRO]  7.62,31.5 0 top
JP7  STAND-OFF  [STAND-OFF]  40.39,29.72 0 top
JP8  STAND-OFF  [STAND-OFF]  65.79,29.72 0 top
JP9  FIDUCIALUFIDUCIAL  [FIDUCIAL-MICRO]  67.44,7.75 0 top
JP10  FIDUCIALUFIDUCIAL  [FIDUCIAL-MICRO]  38.61,31.5 0 top
JP11  FIDUCIALUFIDUCIAL  [FIDUCIAL-MICRO]  67.44,7.75 0 bottom
JP12  FIDUCIALUFIDUCIAL  [FIDUCIAL-MICRO]  38.61,31.5 0 bottom
JP13  STAND-OFF  [STAND-OFF]  71.37,29.72 0 top
JP14  STAND-OFF  [STAND-OFF]  96.77,29.72 0 top
JP15  FIDUCIALUFIDUCIAL  [FIDUCIAL-MICRO]  98.42,7.75 0 top
JP16  FIDUCIALUFIDUCIAL  [FIDUCIAL-MICRO]  69.6,31.5 0 top
JP17  FIDUCIALUFIDUCIAL  [FIDUCIAL-MICRO]  98.42,7.75 0 bottom
JP18  FIDUCIALUFIDUCIAL  [FIDUCIAL-MICRO]  69.6,31.5 0 bottom
JP19  STAND-OFF  [STAND-OFF]  102.36,29.72 0 top
JP20  STAND-OFF  [STAND-OFF]  127.76,29.72 0 top
JP21  FIDUCIALUFIDUCIAL  [FIDUCIAL-MICRO]  129.41,7.75 0 top
JP22  FIDUCIALUFIDUCIAL  [FIDUCIAL-MICRO]  100.58,31.5 0 top
JP23  FIDUCIALUFIDUCIAL  [FIDUCIAL-MICRO]  129.41,7.75 0 bottom
JP24  FIDUCIALUFIDUCIAL  [FIDUCIAL-MICRO]  100.58,31.5 0 bottom
JP25  STAND-OFF  [STAND-OFF]  9.4,55.63 0 top
JP26  STAND-OFF  [STAND-OFF]  34.8,55.63 0 top
JP27  FIDUCIALUFIDUCIAL  [FIDUCIAL-MICRO]  36.45,33.66 0 top
JP28  FIDUCIALUFIDUCIAL  [FIDUCIAL-MICRO]  7.62,57.4 0 top
JP29  FIDUCIALUFIDUCIAL  [FIDUCIAL-MICRO]  36.45,33.66 0 bottom
JP30  FIDUCIALUFIDUCIAL  [FIDUCIAL-MICRO]  7.62,57.4 0 bottom
JP31  STAND-OFF  [STAND-OFF]  40.39,55.63 0 top
JP32  STAND-OFF  [STAND-OFF]  65.79,55.63 0 top
JP33  FIDUCIALUFIDUCIAL  [FIDUCIAL-MICRO]  67.44,33.66 0 top
JP34  FIDUCIALUFIDUCIAL  [FIDUCIAL-MICRO]  38.61,57.4 0 top
JP35  FIDUCIALUFIDUCIAL  [FIDUCIAL-MICRO]  67.44,33.66 0 bottom
JP36  FIDUCIALUFIDUCIAL  [FIDUCIAL-MICRO]  38.61,57.4 0 bottom
JP37  STAND-OFF  [STAND-OFF]  71.37,55.63 0 top
JP38  STAND-OFF  [STAND-OFF]  96.77,55.63 0 top
JP39  FIDUCIALUFIDUCIAL  [FIDUCIAL-MICRO]  98.42,33.66 0 top
JP40  FIDUCIALUFIDUCIAL  [FIDUCIAL-MICRO]  69.6,57.4 0 top
JP41  FIDUCIALUFIDUCIAL  [FIDUCIAL-MICRO]  98.42,33.66 0 bottom
JP42  FIDUCIALUFIDUCIAL  [FIDUCIAL-MICRO]  69.6,57.4 0 bottom
JP43  STAND-OFF  [STAND-OFF]  102.36,55.63 0 top
JP44  STAND-OFF  [STAND-OFF]  127.76,55.63 0 top
JP45  FIDUCIALUFIDUCIAL  [FIDUCIAL-MICRO]  129.41,33.66 0 top
JP46  FIDUCIALUFIDUCIAL  [FIDUCIAL-MICRO]  100.58,57.4 0 top
JP47  FIDUCIALUFIDUCIAL  [FIDUCIAL-MICRO]  129.41,33.66 0 bottom
JP48  FIDUCIALUFIDUCIAL  [FIDUCIAL-MICRO]  100.58,57.4 0 bottom
JP49  STAND-OFF  [STAND-OFF]  9.4,81.53 0 top
JP50  STAND-OFF  [STAND-OFF]  34.8,81.53 0 top
JP51  FIDUCIALUFIDUCIAL  [FIDUCIAL-MICRO]  36.45,59.56 0 top
JP52  FIDUCIALUFIDUCIAL  [FIDUCIAL-MICRO]  7.62,83.31 0 top
JP53  FIDUCIALUFIDUCIAL  [FIDUCIAL-MICRO]  36.45,59.56 0 bottom
JP54  FIDUCIALUFIDUCIAL  [FIDUCIAL-MICRO]  7.62,83.31 0 bottom
JP55  STAND-OFF  [STAND-OFF]  40.39,81.53 0 top
JP56  STAND-OFF  [STAND-OFF]  65.79,81.53 0 top
JP57  FIDUCIALUFIDUCIAL  [FIDUCIAL-MICRO]  67.44,59.56 0 top
JP58  FIDUCIALUFIDUCIAL  [FIDUCIAL-MICRO]  38.61,83.31 0 top
JP59  FIDUCIALUFIDUCIAL  [FIDUCIAL-MICRO]  67.44,59.56 0 bottom
JP60  FIDUCIALUFIDUCIAL  [FIDUCIAL-MICRO]  38.61,83.31 0 bottom
JP61  STAND-OFF  [STAND-OFF]  71.37,81.53 0 top
JP62  STAND-OFF  [STAND-OFF]  96.77,81.53 0 top
JP63  FIDUCIALUFIDUCIAL  [FIDUCIAL-MICRO]  98.42,59.56 0 top
JP64  FIDUCIALUFIDUCIAL  [FIDUCIAL-MICRO]  69.6,83.31 0 top
JP65  FIDUCIALUFIDUCIAL  [FIDUCIAL-MICRO]  98.42,59.56 0 bottom
JP66  FIDUCIALUFIDUCIAL  [FIDUCIAL-MICRO]  69.6,83.31 0 bottom
JP67  STAND-OFF  [STAND-OFF]  102.36,81.53 0 top
JP68  STAND-OFF  [STAND-OFF]  127.76,81.53 0 top
JP69  FIDUCIALUFIDUCIAL  [FIDUCIAL-MICRO]  129.41,59.56 0 top
JP70  FIDUCIALUFIDUCIAL  [FIDUCIAL-MICRO]  100.58,83.31 0 top
JP71  FIDUCIALUFIDUCIAL  [FIDUCIAL-MICRO]  129.41,59.56 0 bottom
JP72  FIDUCIALUFIDUCIAL  [FIDUCIAL-MICRO]  100.58,83.31 0 bottom
JP73  STAND-OFF  [STAND-OFF]  9.4,107.44 0 top
JP74  STAND-OFF  [STAND-OFF]  34.8,107.44 0 top
JP75  FIDUCIALUFIDUCIAL  [FIDUCIAL-MICRO]  36.45,85.47 0 top
JP76  FIDUCIALUFIDUCIAL  [FIDUCIAL-MICRO]  7.62,109.22 0 top
JP77  FIDUCIALUFIDUCIAL  [FIDUCIAL-MICRO]  36.45,85.47 0 bottom
JP78  FIDUCIALUFIDUCIAL  [FIDUCIAL-MICRO]  7.62,109.22 0 bottom
JP79  STAND-OFF  [STAND-OFF]  40.39,107.44 0 top
JP80  STAND-OFF  [STAND-OFF]  65.79,107.44 0 top
JP81  FIDUCIALUFIDUCIAL  [FIDUCIAL-MICRO]  67.44,85.47 0 top
JP82  FIDUCIALUFIDUCIAL  [FIDUCIAL-MICRO]  38.61,109.22 0 top
JP83  FIDUCIALUFIDUCIAL  [FIDUCIAL-MICRO]  67.44,85.47 0 bottom
JP84  FIDUCIALUFIDUCIAL  [FIDUCIAL-MICRO]  38.61,109.22 0 bottom
JP85  STAND-OFF  [STAND-OFF]  71.37,107.44 0 top
JP86  STAND-OFF  [STAND-OFF]  96.77,107.44 0 top
JP87  FIDUCIALUFIDUCIAL  [FIDUCIAL-MICRO]  98.42,85.47 0 top
JP88  FIDUCIALUFIDUCIAL  [FIDUCIAL-MICRO]  69.6,109.22 0 top
JP89  FIDUCIALUFIDUCIAL  [FIDUCIAL-MICRO]  98.42,85.47 0 bottom
JP90  FIDUCIALUFIDUCIAL  [FIDUCIAL-MICRO]  69.6,109.22 0 bottom
JP91  STAND-OFF  [STAND-OFF]  102.36,107.44 0 top
JP92  STAND-OFF  [STAND-OFF]  127.76,107.44 0 top
JP93  FIDUCIALUFIDUCIAL  [FIDUCIAL-MICRO]  129.41,85.47 0 top
JP94  FIDUCIALUFIDUCIAL  [FIDUCIAL-MICRO]  100.58,109.22 0 top
JP95  FIDUCIALUFIDUCIAL  [FIDUCIAL-MICRO]  129.41,85.47 0 bottom
JP96  FIDUCIALUFIDUCIAL  [FIDUCIAL-MICRO]  100.58,109.22 0 bottom
JP97  STAND-OFF  [STAND-OFF]  9.4,133.35 0 top
JP98  STAND-OFF  [STAND-OFF]  34.8,133.35 0 top
JP99  FIDUCIALUFIDUCIAL  [FIDUCIAL-MICRO]  36.45,111.38 0 top
JP100  FIDUCIALUFIDUCIAL  [FIDUCIAL-MICRO]  7.62,135.13 0 top
JP101  FIDUCIALUFIDUCIAL  [FIDUCIAL-MICRO]  36.45,111.38 0 bottom
JP102  FIDUCIALUFIDUCIAL  [FIDUCIAL-MICRO]  7.62,135.13 0 bottom
JP103  STAND-OFF  [STAND-OFF]  40.39,133.35 0 top
JP104  STAND-OFF  [STAND-OFF]  65.79,133.35 0 top
JP105  FIDUCIALUFIDUCIAL  [FIDUCIAL-MICRO]  67.44,111.38 0 top
JP106  FIDUCIALUFIDUCIAL  [FIDUCIAL-MICRO]  38.61,135.13 0 top
JP107  FIDUCIALUFIDUCIAL  [FIDUCIAL-MICRO]  67.44,111.38 0 bottom
JP108  FIDUCIALUFIDUCIAL  [FIDUCIAL-MICRO]  38.61,135.13 0 bottom
JP109  STAND-OFF  [STAND-OFF]  71.37,133.35 0 top
JP110  STAND-OFF  [STAND-OFF]  96.77,133.35 0 top
JP111  FIDUCIALUFIDUCIAL  [FIDUCIAL-MICRO]  98.42,111.38 0 top
JP112  FIDUCIALUFIDUCIAL  [FIDUCIAL-MICRO]  69.6,135.13 0 top
JP113  FIDUCIALUFIDUCIAL  [FIDUCIAL-MICRO]  98.42,111.38 0 bottom
JP114  FIDUCIALUFIDUCIAL  [FIDUCIAL-MICRO]  69.6,135.13 0 bottom
JP115  STAND-OFF  [STAND-OFF]  102.36,133.35 0 top
JP116  STAND-OFF  [STAND-OFF]  127.76,133.35 0 top
JP117  FIDUCIALUFIDUCIAL  [FIDUCIAL-MICRO]  129.41,111.38 0 top
JP118  FIDUCIALUFIDUCIAL  [FIDUCIAL-MICRO]  100.58,135.13 0 top
JP119  FIDUCIALUFIDUCIAL  [FIDUCIAL-MICRO]  129.41,111.38 0 bottom
JP120  FIDUCIALUFIDUCIAL  [FIDUCIAL-MICRO]  100.58,135.13 0 bottom
JP121  STAND-OFF  [STAND-OFF]  9.4,159.26 0 top
JP122  STAND-OFF  [STAND-OFF]  34.8,159.26 0 top
JP123  FIDUCIALUFIDUCIAL  [FIDUCIAL-MICRO]  36.45,137.29 0 top
JP124  FIDUCIALUFIDUCIAL  [FIDUCIAL-MICRO]  7.62,161.04 0 top
JP125  FIDUCIALUFIDUCIAL  [FIDUCIAL-MICRO]  36.45,137.29 0 bottom
JP126  FIDUCIALUFIDUCIAL  [FIDUCIAL-MICRO]  7.62,161.04 0 bottom
JP127  STAND-OFF  [STAND-OFF]  40.39,159.26 0 top
JP128  STAND-OFF  [STAND-OFF]  65.79,159.26 0 top
JP129  FIDUCIALUFIDUCIAL  [FIDUCIAL-MICRO]  67.44,137.29 0 top
JP130  FIDUCIALUFIDUCIAL  [FIDUCIAL-MICRO]  38.61,161.04 0 top
JP131  FIDUCIALUFIDUCIAL  [FIDUCIAL-MICRO]  67.44,137.29 0 bottom
JP132  FIDUCIALUFIDUCIAL  [FIDUCIAL-MICRO]  38.61,161.04 0 bottom
JP133  STAND-OFF  [STAND-OFF]  71.37,159.26 0 top
JP134  STAND-OFF  [STAND-OFF]  96.77,159.26 0 top
JP135  FIDUCIALUFIDUCIAL  [FIDUCIAL-MICRO]  98.42,137.29 0 top
JP136  FIDUCIALUFIDUCIAL  [FIDUCIAL-MICRO]  69.6,161.04 0 top
JP137  FIDUCIALUFIDUCIAL  [FIDUCIAL-MICRO]  98.42,137.29 0 bottom
JP138  FIDUCIALUFIDUCIAL  [FIDUCIAL-MICRO]  69.6,161.04 0 bottom
JP139  STAND-OFF  [STAND-OFF]  102.36,159.26 0 top
JP140  STAND-OFF  [STAND-OFF]  127.76,159.26 0 top
JP141  FIDUCIALUFIDUCIAL  [FIDUCIAL-MICRO]  129.41,137.29 0 top
JP142  FIDUCIALUFIDUCIAL  [FIDUCIAL-MICRO]  100.58,161.04 0 top
JP143  FIDUCIALUFIDUCIAL  [FIDUCIAL-MICRO]  129.41,137.29 0 bottom
JP144  FIDUCIALUFIDUCIAL  [FIDUCIAL-MICRO]  100.58,161.04 0 bottom
LED  [SMT-JUMPER_2_NC_TRACE_SILK]  34.27,22.4 180 bottom
LED1  [SMT-JUMPER_2_NC_TRACE_SILK]  65.26,22.4 180 bottom
LED2  [SMT-JUMPER_2_NC_TRACE_SILK]  96.24,22.4 180 bottom
LED3  [SMT-JUMPER_2_NC_TRACE_SILK]  127.23,22.4 180 bottom
LED4  [SMT-JUMPER_2_NC_TRACE_SILK]  34.27,48.31 180 bottom
LED5  [SMT-JUMPER_2_NC_TRACE_SILK]  65.26,48.31 180 bottom
LED6  [SMT-JUMPER_2_NC_TRACE_SILK]  96.24,48.31 180 bottom
LED7  [SMT-JUMPER_2_NC_TRACE_SILK]  127.23,48.31 180 bottom
LED8  [SMT-JUMPER_2_NC_TRACE_SILK]  34.27,74.22 180 bottom
LED9  [SMT-JUMPER_2_NC_TRACE_SILK]  65.26,74.22 180 bottom
LED10  [SMT-JUMPER_2_NC_TRACE_SILK]  96.24,74.22 180 bottom
LED11  [SMT-JUMPER_2_NC_TRACE_SILK]  127.23,74.22 180 bottom
LED12  [SMT-JUMPER_2_NC_TRACE_SILK]  34.27,100.13 180 bottom
LED13  [SMT-JUMPER_2_NC_TRACE_SILK]  65.26,100.13 180 bottom
LED14  [SMT-JUMPER_2_NC_TRACE_SILK]  96.24,100.13 180 bottom
LED15  [SMT-JUMPER_2_NC_TRACE_SILK]  127.23,100.13 180 bottom
LED16  [SMT-JUMPER_2_NC_TRACE_SILK]  34.27,126.03 180 bottom
LED17  [SMT-JUMPER_2_NC_TRACE_SILK]  65.26,126.03 180 bottom
LED18  [SMT-JUMPER_2_NC_TRACE_SILK]  96.24,126.03 180 bottom
LED19  [SMT-JUMPER_2_NC_TRACE_SILK]  127.23,126.03 180 bottom
LED20  [SMT-JUMPER_2_NC_TRACE_SILK]  34.27,151.94 180 bottom
LED21  [SMT-JUMPER_2_NC_TRACE_SILK]  65.26,151.94 180 bottom
LED22  [SMT-JUMPER_2_NC_TRACE_SILK]  96.24,151.94 180 bottom
LED23  [SMT-JUMPER_2_NC_TRACE_SILK]  127.23,151.94 180 bottom
LOGO1  OSHW-LOGOMINI  [OSHW-LOGO-MINI]  34.8,9.4 0 bottom
LOGO2  REVISION  [REVISION]  5.59,-3.3 0 top  (outside the outline)
LOGO3  OSHW-LOGOMINI  [OSHW-LOGO-MINI]  65.79,9.4 0 bottom
LOGO4  SFE_LOGO_FLAME.2_INCH  [SFE_LOGO_FLAME_.2]  27.68,19.51 0 top
LOGO5  SFE_LOGO_NAME_FLAME.1_INCH  [SFE_LOGO_NAME_FLAME_.1]  21.44,15.64 0 bottom
LOGO6  SFE_LOGO_FLAME.2_INCH  [SFE_LOGO_FLAME_.2]  58.66,19.51 0 top
LOGO7  SFE_LOGO_NAME_FLAME.1_INCH  [SFE_LOGO_NAME_FLAME_.1]  52.43,15.64 0 bottom
LOGO8  REVISION  [REVISION]  36.58,-3.3 0 top  (outside the outline)
LOGO9  OSHW-LOGOMINI  [OSHW-LOGO-MINI]  96.77,9.4 0 bottom
LOGO10  SFE_LOGO_FLAME.2_INCH  [SFE_LOGO_FLAME_.2]  89.65,19.51 0 top
LOGO11  SFE_LOGO_NAME_FLAME.1_INCH  [SFE_LOGO_NAME_FLAME_.1]  83.42,15.64 0 bottom
LOGO12  REVISION  [REVISION]  67.56,-3.3 0 top  (outside the outline)
LOGO13  OSHW-LOGOMINI  [OSHW-LOGO-MINI]  127.76,9.4 0 bottom
LOGO14  SFE_LOGO_FLAME.2_INCH  [SFE_LOGO_FLAME_.2]  120.64,19.51 0 top
LOGO15  SFE_LOGO_NAME_FLAME.1_INCH  [SFE_LOGO_NAME_FLAME_.1]  114.4,15.64 0 bottom
LOGO16  REVISION  [REVISION]  98.55,-3.3 0 top  (outside the outline)
LOGO17  OSHW-LOGOMINI  [OSHW-LOGO-MINI]  34.8,35.31 0 bottom
LOGO18  SFE_LOGO_FLAME.2_INCH  [SFE_LOGO_FLAME_.2]  27.68,45.42 0 top
LOGO19  SFE_LOGO_NAME_FLAME.1_INCH  [SFE_LOGO_NAME_FLAME_.1]  21.44,41.55 0 bottom
LOGO20  REVISION  [REVISION]  5.59,22.61 0 top
LOGO21  OSHW-LOGOMINI  [OSHW-LOGO-MINI]  65.79,35.31 0 bottom
LOGO22  SFE_LOGO_FLAME.2_INCH  [SFE_LOGO_FLAME_.2]  58.66,45.42 0 top
LOGO23  SFE_LOGO_NAME_FLAME.1_INCH  [SFE_LOGO_NAME_FLAME_.1]  52.43,41.55 0 bottom
LOGO24  REVISION  [REVISION]  36.58,22.61 0 top
LOGO25  OSHW-LOGOMINI  [OSHW-LOGO-MINI]  96.77,35.31 0 bottom
LOGO26  SFE_LOGO_FLAME.2_INCH  [SFE_LOGO_FLAME_.2]  89.65,45.42 0 top
LOGO27  SFE_LOGO_NAME_FLAME.1_INCH  [SFE_LOGO_NAME_FLAME_.1]  83.42,41.55 0 bottom
LOGO28  REVISION  [REVISION]  67.56,22.61 0 top
LOGO29  OSHW-LOGOMINI  [OSHW-LOGO-MINI]  127.76,35.31 0 bottom
LOGO30  SFE_LOGO_FLAME.2_INCH  [SFE_LOGO_FLAME_.2]  120.64,45.42 0 top
LOGO31  SFE_LOGO_NAME_FLAME.1_INCH  [SFE_LOGO_NAME_FLAME_.1]  114.4,41.55 0 bottom
LOGO32  REVISION  [REVISION]  98.55,22.61 0 top
LOGO33  OSHW-LOGOMINI  [OSHW-LOGO-MINI]  34.8,61.21 0 bottom
LOGO34  SFE_LOGO_FLAME.2_INCH  [SFE_LOGO_FLAME_.2]  27.68,71.32 0 top
LOGO35  SFE_LOGO_NAME_FLAME.1_INCH  [SFE_LOGO_NAME_FLAME_.1]  21.44,67.45 0 bottom
LOGO36  REVISION  [REVISION]  5.59,48.51 0 top
LOGO37  OSHW-LOGOMINI  [OSHW-LOGO-MINI]  65.79,61.21 0 bottom
LOGO38  SFE_LOGO_FLAME.2_INCH  [SFE_LOGO_FLAME_.2]  58.66,71.32 0 top
LOGO39  SFE_LOGO_NAME_FLAME.1_INCH  [SFE_LOGO_NAME_FLAME_.1]  52.43,67.45 0 bottom
LOGO40  REVISION  [REVISION]  36.58,48.51 0 top
LOGO41  OSHW-LOGOMINI  [OSHW-LOGO-MINI]  96.77,61.21 0 bottom
LOGO42  SFE_LOGO_FLAME.2_INCH  [SFE_LOGO_FLAME_.2]  89.65,71.32 0 top
LOGO43  SFE_LOGO_NAME_FLAME.1_INCH  [SFE_LOGO_NAME_FLAME_.1]  83.42,67.45 0 bottom
LOGO44  REVISION  [REVISION]  67.56,48.51 0 top
LOGO45  OSHW-LOGOMINI  [OSHW-LOGO-MINI]  127.76,61.21 0 bottom
LOGO46  SFE_LOGO_FLAME.2_INCH  [SFE_LOGO_FLAME_.2]  120.64,71.32 0 top
LOGO47  SFE_LOGO_NAME_FLAME.1_INCH  [SFE_LOGO_NAME_FLAME_.1]  114.4,67.45 0 bottom
LOGO48  REVISION  [REVISION]  98.55,48.51 0 top
LOGO49  OSHW-LOGOMINI  [OSHW-LOGO-MINI]  34.8,87.12 0 bottom
LOGO50  SFE_LOGO_FLAME.2_INCH  [SFE_LOGO_FLAME_.2]  27.68,97.23 0 top
LOGO51  SFE_LOGO_NAME_FLAME.1_INCH  [SFE_LOGO_NAME_FLAME_.1]  21.44,93.36 0 bottom
LOGO52  REVISION  [REVISION]  5.59,74.42 0 top
LOGO53  OSHW-LOGOMINI  [OSHW-LOGO-MINI]  65.79,87.12 0 bottom
LOGO54  SFE_LOGO_FLAME.2_INCH  [SFE_LOGO_FLAME_.2]  58.66,97.23 0 top
LOGO55  SFE_LOGO_NAME_FLAME.1_INCH  [SFE_LOGO_NAME_FLAME_.1]  52.43,93.36 0 bottom
LOGO56  REVISION  [REVISION]  36.58,74.42 0 top
LOGO57  OSHW-LOGOMINI  [OSHW-LOGO-MINI]  96.77,87.12 0 bottom
LOGO58  SFE_LOGO_FLAME.2_INCH  [SFE_LOGO_FLAME_.2]  89.65,97.23 0 top
LOGO59  SFE_LOGO_NAME_FLAME.1_INCH  [SFE_LOGO_NAME_FLAME_.1]  83.42,93.36 0 bottom
LOGO60  REVISION  [REVISION]  67.56,74.42 0 top
LOGO61  OSHW-LOGOMINI  [OSHW-LOGO-MINI]  127.76,87.12 0 bottom
LOGO62  SFE_LOGO_FLAME.2_INCH  [SFE_LOGO_FLAME_.2]  120.64,97.23 0 top
LOGO63  SFE_LOGO_NAME_FLAME.1_INCH  [SFE_LOGO_NAME_FLAME_.1]  114.4,93.36 0 bottom
LOGO64  REVISION  [REVISION]  98.55,74.42 0 top
LOGO65  OSHW-LOGOMINI  [OSHW-LOGO-MINI]  34.8,113.03 0 bottom
LOGO66  SFE_LOGO_FLAME.2_INCH  [SFE_LOGO_FLAME_.2]  27.68,123.14 0 top
LOGO67  SFE_LOGO_NAME_FLAME.1_INCH  [SFE_LOGO_NAME_FLAME_.1]  21.44,119.27 0 bottom
LOGO68  REVISION  [REVISION]  5.59,100.33 0 top
LOGO69  OSHW-LOGOMINI  [OSHW-LOGO-MINI]  65.79,113.03 0 bottom
LOGO70  SFE_LOGO_FLAME.2_INCH  [SFE_LOGO_FLAME_.2]  58.66,123.14 0 top
LOGO71  SFE_LOGO_NAME_FLAME.1_INCH  [SFE_LOGO_NAME_FLAME_.1]  52.43,119.27 0 bottom
LOGO72  REVISION  [REVISION]  36.58,100.33 0 top
LOGO73  OSHW-LOGOMINI  [OSHW-LOGO-MINI]  96.77,113.03 0 bottom
LOGO74  SFE_LOGO_FLAME.2_INCH  [SFE_LOGO_FLAME_.2]  89.65,123.14 0 top
LOGO75  SFE_LOGO_NAME_FLAME.1_INCH  [SFE_LOGO_NAME_FLAME_.1]  83.42,119.27 0 bottom
LOGO76  REVISION  [REVISION]  67.56,100.33 0 top
LOGO77  OSHW-LOGOMINI  [OSHW-LOGO-MINI]  127.76,113.03 0 bottom
LOGO78  SFE_LOGO_FLAME.2_INCH  [SFE_LOGO_FLAME_.2]  120.64,123.14 0 top
LOGO79  SFE_LOGO_NAME_FLAME.1_INCH  [SFE_LOGO_NAME_FLAME_.1]  114.4,119.27 0 bottom
LOGO80  REVISION  [REVISION]  98.55,100.33 0 top
LOGO81  OSHW-LOGOMINI  [OSHW-LOGO-MINI]  34.8,138.94 0 bottom
LOGO82  SFE_LOGO_FLAME.2_INCH  [SFE_LOGO_FLAME_.2]  27.68,149.05 0 top
LOGO83  SFE_LOGO_NAME_FLAME.1_INCH  [SFE_LOGO_NAME_FLAME_.1]  21.44,145.18 0 bottom
LOGO84  REVISION  [REVISION]  5.59,126.24 0 top
LOGO85  OSHW-LOGOMINI  [OSHW-LOGO-MINI]  65.79,138.94 0 bottom
LOGO86  SFE_LOGO_FLAME.2_INCH  [SFE_LOGO_FLAME_.2]  58.66,149.05 0 top
LOGO87  SFE_LOGO_NAME_FLAME.1_INCH  [SFE_LOGO_NAME_FLAME_.1]  52.43,145.18 0 bottom
LOGO88  REVISION  [REVISION]  36.58,126.24 0 top
LOGO89  OSHW-LOGOMINI  [OSHW-LOGO-MINI]  96.77,138.94 0 bottom
LOGO90  SFE_LOGO_FLAME.2_INCH  [SFE_LOGO_FLAME_.2]  89.65,149.05 0 top
LOGO91  SFE_LOGO_NAME_FLAME.1_INCH  [SFE_LOGO_NAME_FLAME_.1]  83.42,145.18 0 bottom
LOGO92  REVISION  [REVISION]  67.56,126.24 0 top
LOGO93  OSHW-LOGOMINI  [OSHW-LOGO-MINI]  127.76,138.94 0 bottom
LOGO94  SFE_LOGO_FLAME.2_INCH  [SFE_LOGO_FLAME_.2]  120.64,149.05 0 top
LOGO95  SFE_LOGO_NAME_FLAME.1_INCH  [SFE_LOGO_NAME_FLAME_.1]  114.4,145.18 0 bottom
LOGO96  REVISION  [REVISION]  98.55,126.24 0 top
PS0  [SMT-JUMPER_2_NO_SILK]  13.21,13.21 180 bottom
PS1  [SMT-JUMPER_2_NO_SILK]  13.21,15.75 180 bottom
PS2  [SMT-JUMPER_2_NO_SILK]  44.2,13.21 180 bottom
PS3  [SMT-JUMPER_2_NO_SILK]  44.2,15.75 180 bottom
PS4  [SMT-JUMPER_2_NO_SILK]  75.18,13.21 180 bottom
PS5  [SMT-JUMPER_2_NO_SILK]  75.18,15.75 180 bottom
PS6  [SMT-JUMPER_2_NO_SILK]  106.17,13.21 180 bottom
PS7  [SMT-JUMPER_2_NO_SILK]  106.17,15.75 180 bottom
PS8  [SMT-JUMPER_2_NO_SILK]  13.21,39.12 180 bottom
PS9  [SMT-JUMPER_2_NO_SILK]  13.21,41.66 180 bottom
PS10  [SMT-JUMPER_2_NO_SILK]  44.2,39.12 180 bottom
PS11  [SMT-JUMPER_2_NO_SILK]  44.2,41.66 180 bottom
PS12  [SMT-JUMPER_2_NO_SILK]  75.18,39.12 180 bottom
PS13  [SMT-JUMPER_2_NO_SILK]  75.18,41.66 180 bottom
PS14  [SMT-JUMPER_2_NO_SILK]  106.17,39.12 180 bottom
PS15  [SMT-JUMPER_2_NO_SILK]  106.17,41.66 180 bottom
PS16  [SMT-JUMPER_2_NO_SILK]  13.21,65.02 180 bottom
PS17  [SMT-JUMPER_2_NO_SILK]  13.21,67.56 180 bottom
PS18  [SMT-JUMPER_2_NO_SILK]  44.2,65.02 180 bottom
PS19  [SMT-JUMPER_2_NO_SILK]  44.2,67.56 180 bottom
PS20  [SMT-JUMPER_2_NO_SILK]  75.18,65.02 180 bottom
PS21  [SMT-JUMPER_2_NO_SILK]  75.18,67.56 180 bottom
PS22  [SMT-JUMPER_2_NO_SILK]  106.17,65.02 180 bottom
PS23  [SMT-JUMPER_2_NO_SILK]  106.17,67.56 180 bottom
PS24  [SMT-JUMPER_2_NO_SILK]  13.21,90.93 180 bottom
PS25  [SMT-JUMPER_2_NO_SILK]  13.21,93.47 180 bottom
PS26  [SMT-JUMPER_2_NO_SILK]  44.2,90.93 180 bottom
PS27  [SMT-JUMPER_2_NO_SILK]  44.2,93.47 180 bottom
PS28  [SMT-JUMPER_2_NO_SILK]  75.18,90.93 180 bottom
PS29  [SMT-JUMPER_2_NO_SILK]  75.18,93.47 180 bottom
PS30  [SMT-JUMPER_2_NO_SILK]  106.17,90.93 180 bottom
PS31  [SMT-JUMPER_2_NO_SILK]  106.17,93.47 180 bottom
PS32  [SMT-JUMPER_2_NO_SILK]  13.21,116.84 180 bottom
PS33  [SMT-JUMPER_2_NO_SILK]  13.21,119.38 180 bottom
PS34  [SMT-JUMPER_2_NO_SILK]  44.2,116.84 180 bottom
PS35  [SMT-JUMPER_2_NO_SILK]  44.2,119.38 180 bottom
PS36  [SMT-JUMPER_2_NO_SILK]  75.18,116.84 180 bottom
PS37  [SMT-JUMPER_2_NO_SILK]  75.18,119.38 180 bottom
PS38  [SMT-JUMPER_2_NO_SILK]  106.17,116.84 180 bottom
PS39  [SMT-JUMPER_2_NO_SILK]  106.17,119.38 180 bottom
PS40  [SMT-JUMPER_2_NO_SILK]  13.21,142.75 180 bottom
PS41  [SMT-JUMPER_2_NO_SILK]  13.21,145.29 180 bottom
PS42  [SMT-JUMPER_2_NO_SILK]  44.2,142.75 180 bottom
PS43  [SMT-JUMPER_2_NO_SILK]  44.2,145.29 180 bottom
PS44  [SMT-JUMPER_2_NO_SILK]  75.18,142.75 180 bottom
PS45  [SMT-JUMPER_2_NO_SILK]  75.18,145.29 180 bottom
PS46  [SMT-JUMPER_2_NO_SILK]  106.17,142.75 180 bottom
PS47  [SMT-JUMPER_2_NO_SILK]  106.17,145.29 180 bottom
PWR  RED  [LED-0603]  34.42,25.15 270 top
PWR1  RED  [LED-0603]  65.41,25.15 270 top
PWR2  RED  [LED-0603]  96.39,25.15 270 top
PWR3  RED  [LED-0603]  127.38,25.15 270 top
PWR4  RED  [LED-0603]  34.42,51.05 270 top
PWR5  RED  [LED-0603]  65.41,51.05 270 top
PWR6  RED  [LED-0603]  96.39,51.05 270 top
PWR7  RED  [LED-0603]  127.38,51.05 270 top
PWR8  RED  [LED-0603]  34.42,76.96 270 top
PWR9  RED  [LED-0603]  65.41,76.96 270 top
PWR10  RED  [LED-0603]  96.39,76.96 270 top
PWR11  RED  [LED-0603]  127.38,76.96 270 top
PWR12  RED  [LED-0603]  34.42,102.87 270 top
PWR13  RED  [LED-0603]  65.41,102.87 270 top
PWR14  RED  [LED-0603]  96.39,102.87 270 top
PWR15  RED  [LED-0603]  127.38,102.87 270 top
PWR16  RED  [LED-0603]  34.42,128.78 270 top
PWR17  RED  [LED-0603]  65.41,128.78 270 top
PWR18  RED  [LED-0603]  96.39,128.78 270 top
PWR19  RED  [LED-0603]  127.38,128.78 270 top
PWR20  RED  [LED-0603]  34.42,154.69 270 top
PWR21  RED  [LED-0603]  65.41,154.69 270 top
PWR22  RED  [LED-0603]  96.39,154.69 270 top
PWR23  RED  [LED-0603]  127.38,154.69 270 top
R1  10k  [0603]  22.99,14.48 270 top
R2  4.7k  [0603]  35.94,25.15 270 top
R3  10k  [0603]  28.7,14.48 270 top
R4  10k  [0603]  53.97,14.48 270 top
R5  10k  [0603]  59.69,14.48 270 top
R6  10k  [0603]  17.02,19.56 90 top
R7  10k  [0603]  17.27,14.48 90 top
R8  10k  [0603]  15.37,14.48 90 top
R9  4.7k  [0603]  26.8,14.48 270 top
R10  4.7k  [0603]  24.89,14.48 270 top
R11  10k  [0603]  48.01,19.56 90 top
R12  2.2k  [0603]  33.53,14.48 0 top
R13  2.2k  [0603]  33.53,9.4 0 top
R14  10k  [0603]  48.26,14.48 90 top
R15  10k  [0603]  46.35,14.48 90 top
R16  4.7k  [0603]  57.78,14.48 270 top
R17  4.7k  [0603]  55.88,14.48 270 top
R18  2.2k  [0603]  64.52,14.48 0 top
R19  2.2k  [0603]  64.52,9.4 0 top
R20  4.7k  [0603]  66.93,25.15 270 top
R21  10k  [0603]  84.96,14.48 270 top
R22  10k  [0603]  90.68,14.48 270 top
R23  10k  [0603]  78.99,19.56 90 top
R24  10k  [0603]  79.25,14.48 90 top
R25  10k  [0603]  77.34,14.48 90 top
R26  4.7k  [0603]  88.77,14.48 270 top
R27  4.7k  [0603]  86.87,14.48 270 top
R28  2.2k  [0603]  95.5,14.48 0 top
R29  2.2k  [0603]  95.5,9.4 0 top
R30  4.7k  [0603]  97.92,25.15 270 top
R31  10k  [0603]  115.95,14.48 270 top
R32  10k  [0603]  121.67,14.48 270 top
R33  10k  [0603]  109.98,19.56 90 top
R34  10k  [0603]  110.24,14.48 90 top
R35  10k  [0603]  108.33,14.48 90 top
R36  4.7k  [0603]  119.76,14.48 270 top
R37  4.7k  [0603]  117.86,14.48 270 top
R38  2.2k  [0603]  126.49,14.48 0 top
R39  2.2k  [0603]  126.49,9.4 0 top
R40  4.7k  [0603]  128.91,25.15 270 top
R41  10k  [0603]  22.99,40.39 270 top
R42  10k  [0603]  28.7,40.39 270 top
R43  10k  [0603]  17.02,45.47 90 top
R44  10k  [0603]  17.27,40.39 90 top
R45  10k  [0603]  15.37,40.39 90 top
R46  4.7k  [0603]  26.8,40.39 270 top
R47  4.7k  [0603]  24.89,40.39 270 top
R48  2.2k  [0603]  33.53,40.39 0 top
R49  2.2k  [0603]  33.53,35.31 0 top
R50  4.7k  [0603]  35.94,51.05 270 top
R51  10k  [0603]  53.97,40.39 270 top
R52  10k  [0603]  59.69,40.39 270 top
R53  10k  [0603]  48.01,45.47 90 top
R54  10k  [0603]  48.26,40.39 90 top
R55  10k  [0603]  46.35,40.39 90 top
R56  4.7k  [0603]  57.78,40.39 270 top
R57  4.7k  [0603]  55.88,40.39 270 top
R58  2.2k  [0603]  64.52,40.39 0 top
R59  2.2k  [0603]  64.52,35.31 0 top
R60  4.7k  [0603]  66.93,51.05 270 top
R61  10k  [0603]  84.96,40.39 270 top
R62  10k  [0603]  90.68,40.39 270 top
R63  10k  [0603]  78.99,45.47 90 top
R64  10k  [0603]  79.25,40.39 90 top
R65  10k  [0603]  77.34,40.39 90 top
R66  4.7k  [0603]  88.77,40.39 270 top
R67  4.7k  [0603]  86.87,40.39 270 top
R68  2.2k  [0603]  95.5,40.39 0 top
R69  2.2k  [0603]  95.5,35.31 0 top
R70  4.7k  [0603]  97.92,51.05 270 top
R71  10k  [0603]  115.95,40.39 270 top
R72  10k  [0603]  121.67,40.39 270 top
R73  10k  [0603]  109.98,45.47 90 top
R74  10k  [0603]  110.24,40.39 90 top
R75  10k  [0603]  108.33,40.39 90 top
R76  4.7k  [0603]  119.76,40.39 270 top
R77  4.7k  [0603]  117.86,40.39 270 top
R78  2.2k  [0603]  126.49,40.39 0 top
R79  2.2k  [0603]  126.49,35.31 0 top
R80  4.7k  [0603]  128.91,51.05 270 top
R81  10k  [0603]  22.99,66.29 270 top
R82  10k  [0603]  28.7,66.29 270 top
R83  10k  [0603]  17.02,71.37 90 top
R84  10k  [0603]  17.27,66.29 90 top
R85  10k  [0603]  15.37,66.29 90 top
R86  4.7k  [0603]  26.8,66.29 270 top
R87  4.7k  [0603]  24.89,66.29 270 top
R88  2.2k  [0603]  33.53,66.29 0 top
R89  2.2k  [0603]  33.53,61.21 0 top
R90  4.7k  [0603]  35.94,76.96 270 top
R91  10k  [0603]  53.97,66.29 270 top
R92  10k  [0603]  59.69,66.29 270 top
R93  10k  [0603]  48.01,71.37 90 top
R94  10k  [0603]  48.26,66.29 90 top
R95  10k  [0603]  46.35,66.29 90 top
R96  4.7k  [0603]  57.78,66.29 270 top
R97  4.7k  [0603]  55.88,66.29 270 top
R98  2.2k  [0603]  64.52,66.29 0 top
R99  2.2k  [0603]  64.52,61.21 0 top
R100  4.7k  [0603]  66.93,76.96 270 top
R101  10k  [0603]  84.96,66.29 270 top
R102  10k  [0603]  90.68,66.29 270 top
R103  10k  [0603]  78.99,71.37 90 top
R104  10k  [0603]  79.25,66.29 90 top
R105  10k  [0603]  77.34,66.29 90 top
R106  4.7k  [0603]  88.77,66.29 270 top
R107  4.7k  [0603]  86.87,66.29 270 top
R108  2.2k  [0603]  95.5,66.29 0 top
R109  2.2k  [0603]  95.5,61.21 0 top
R110  4.7k  [0603]  97.92,76.96 270 top
R111  10k  [0603]  115.95,66.29 270 top
R112  10k  [0603]  121.67,66.29 270 top
R113  10k  [0603]  109.98,71.37 90 top
R114  10k  [0603]  110.24,66.29 90 top
R115  10k  [0603]  108.33,66.29 90 top
R116  4.7k  [0603]  119.76,66.29 270 top
R117  4.7k  [0603]  117.86,66.29 270 top
R118  2.2k  [0603]  126.49,66.29 0 top
R119  2.2k  [0603]  126.49,61.21 0 top
R120  4.7k  [0603]  128.91,76.96 270 top
R121  10k  [0603]  22.99,92.2 270 top
R122  10k  [0603]  28.7,92.2 270 top
R123  10k  [0603]  17.02,97.28 90 top
R124  10k  [0603]  17.27,92.2 90 top
R125  10k  [0603]  15.37,92.2 90 top
R126  4.7k  [0603]  26.8,92.2 270 top
R127  4.7k  [0603]  24.89,92.2 270 top
R128  2.2k  [0603]  33.53,92.2 0 top
R129  2.2k  [0603]  33.53,87.12 0 top
R130  4.7k  [0603]  35.94,102.87 270 top
R131  10k  [0603]  53.97,92.2 270 top
R132  10k  [0603]  59.69,92.2 270 top
R133  10k  [0603]  48.01,97.28 90 top
R134  10k  [0603]  48.26,92.2 90 top
R135  10k  [0603]  46.35,92.2 90 top
R136  4.7k  [0603]  57.78,92.2 270 top
R137  4.7k  [0603]  55.88,92.2 270 top
R138  2.2k  [0603]  64.52,92.2 0 top
R139  2.2k  [0603]  64.52,87.12 0 top
R140  4.7k  [0603]  66.93,102.87 270 top
R141  10k  [0603]  84.96,92.2 270 top
R142  10k  [0603]  90.68,92.2 270 top
R143  10k  [0603]  78.99,97.28 90 top
R144  10k  [0603]  79.25,92.2 90 top
R145  10k  [0603]  77.34,92.2 90 top
R146  4.7k  [0603]  88.77,92.2 270 top
R147  4.7k  [0603]  86.87,92.2 270 top
R148  2.2k  [0603]  95.5,92.2 0 top
R149  2.2k  [0603]  95.5,87.12 0 top
R150  4.7k  [0603]  97.92,102.87 270 top
R151  10k  [0603]  115.95,92.2 270 top
R152  10k  [0603]  121.67,92.2 270 top
R153  10k  [0603]  109.98,97.28 90 top
R154  10k  [0603]  110.24,92.2 90 top
R155  10k  [0603]  108.33,92.2 90 top
R156  4.7k  [0603]  119.76,92.2 270 top
R157  4.7k  [0603]  117.86,92.2 270 top
R158  2.2k  [0603]  126.49,92.2 0 top
R159  2.2k  [0603]  126.49,87.12 0 top
R160  4.7k  [0603]  128.91,102.87 270 top
R161  10k  [0603]  22.99,118.11 270 top
R162  10k  [0603]  28.7,118.11 270 top
R163  10k  [0603]  17.02,123.19 90 top
R164  10k  [0603]  17.27,118.11 90 top
R165  10k  [0603]  15.37,118.11 90 top
R166  4.7k  [0603]  26.8,118.11 270 top
R167  4.7k  [0603]  24.89,118.11 270 top
R168  2.2k  [0603]  33.53,118.11 0 top
R169  2.2k  [0603]  33.53,113.03 0 top
R170  4.7k  [0603]  35.94,128.78 270 top
R171  10k  [0603]  53.97,118.11 270 top
R172  10k  [0603]  59.69,118.11 270 top
R173  10k  [0603]  48.01,123.19 90 top
R174  10k  [0603]  48.26,118.11 90 top
R175  10k  [0603]  46.35,118.11 90 top
R176  4.7k  [0603]  57.78,118.11 270 top
R177  4.7k  [0603]  55.88,118.11 270 top
R178  2.2k  [0603]  64.52,118.11 0 top
R179  2.2k  [0603]  64.52,113.03 0 top
R180  4.7k  [0603]  66.93,128.78 270 top
R181  10k  [0603]  84.96,118.11 270 top
R182  10k  [0603]  90.68,118.11 270 top
R183  10k  [0603]  78.99,123.19 90 top
R184  10k  [0603]  79.25,118.11 90 top
R185  10k  [0603]  77.34,118.11 90 top
R186  4.7k  [0603]  88.77,118.11 270 top
R187  4.7k  [0603]  86.87,118.11 270 top
R188  2.2k  [0603]  95.5,118.11 0 top
R189  2.2k  [0603]  95.5,113.03 0 top
R190  4.7k  [0603]  97.92,128.78 270 top
R191  10k  [0603]  115.95,118.11 270 top
R192  10k  [0603]  121.67,118.11 270 top
R193  10k  [0603]  109.98,123.19 90 top
R194  10k  [0603]  110.24,118.11 90 top
R195  10k  [0603]  108.33,118.11 90 top
R196  4.7k  [0603]  119.76,118.11 270 top
R197  4.7k  [0603]  117.86,118.11 270 top
R198  2.2k  [0603]  126.49,118.11 0 top
R199  2.2k  [0603]  126.49,113.03 0 top
R200  4.7k  [0603]  128.91,128.78 270 top
R201  10k  [0603]  22.99,144.02 270 top
R202  10k  [0603]  28.7,144.02 270 top
R203  10k  [0603]  17.02,149.1 90 top
R204  10k  [0603]  17.27,144.02 90 top
R205  10k  [0603]  15.37,144.02 90 top
R206  4.7k  [0603]  26.8,144.02 270 top
R207  4.7k  [0603]  24.89,144.02 270 top
R208  2.2k  [0603]  33.53,144.02 0 top
R209  2.2k  [0603]  33.53,138.94 0 top
R210  4.7k  [0603]  35.94,154.69 270 top
R211  10k  [0603]  53.97,144.02 270 top
R212  10k  [0603]  59.69,144.02 270 top
R213  10k  [0603]  48.01,149.1 90 top
R214  10k  [0603]  48.26,144.02 90 top
R215  10k  [0603]  46.35,144.02 90 top
R216  4.7k  [0603]  57.78,144.02 270 top
R217  4.7k  [0603]  55.88,144.02 270 top
R218  2.2k  [0603]  64.52,144.02 0 top
R219  2.2k  [0603]  64.52,138.94 0 top
R220  4.7k  [0603]  66.93,154.69 270 top
R221  10k  [0603]  84.96,144.02 270 top
R222  10k  [0603]  90.68,144.02 270 top
R223  10k  [0603]  78.99,149.1 90 top
R224  10k  [0603]  79.25,144.02 90 top
R225  10k  [0603]  77.34,144.02 90 top
R226  4.7k  [0603]  88.77,144.02 270 top
R227  4.7k  [0603]  86.87,144.02 270 top
R228  2.2k  [0603]  95.5,144.02 0 top
R229  2.2k  [0603]  95.5,138.94 0 top
R230  4.7k  [0603]  97.92,154.69 270 top
R231  10k  [0603]  115.95,144.02 270 top
R232  10k  [0603]  121.67,144.02 270 top
R233  10k  [0603]  109.98,149.1 90 top
R234  10k  [0603]  110.24,144.02 90 top
R235  10k  [0603]  108.33,144.02 90 top
R236  4.7k  [0603]  119.76,144.02 270 top
R237  4.7k  [0603]  117.86,144.02 270 top
R238  2.2k  [0603]  126.49,144.02 0 top
R239  2.2k  [0603]  126.49,138.94 0 top
R240  4.7k  [0603]  128.91,154.69 270 top
U1  BNO086  [LGA-28]  53.09,19.56 90 top
U2  BNO086  [LGA-28]  22.1,19.56 90 top
U3  BNO086  [LGA-28]  84.07,19.56 90 top
U4  BNO086  [LGA-28]  115.06,19.56 90 top
U5  BNO086  [LGA-28]  22.1,45.47 90 top
U6  BNO086  [LGA-28]  53.09,45.47 90 top
U7  BNO086  [LGA-28]  84.07,45.47 90 top
U8  BNO086  [LGA-28]  115.06,45.47 90 top
U9  BNO086  [LGA-28]  22.1,71.37 90 top
U10  BNO086  [LGA-28]  53.09,71.37 90 top
U11  BNO086  [LGA-28]  84.07,71.37 90 top
U12  BNO086  [LGA-28]  115.06,71.37 90 top
U13  BNO086  [LGA-28]  22.1,97.28 90 top
U14  BNO086  [LGA-28]  53.09,97.28 90 top
U15  BNO086  [LGA-28]  84.07,97.28 90 top
U16  BNO086  [LGA-28]  115.06,97.28 90 top
U17  BNO086  [LGA-28]  22.1,123.19 90 top
U18  BNO086  [LGA-28]  53.09,123.19 90 top
U19  BNO086  [LGA-28]  84.07,123.19 90 top
U20  BNO086  [LGA-28]  115.06,123.19 90 top
U21  BNO086  [LGA-28]  22.1,149.1 90 top
U22  BNO086  [LGA-28]  53.09,149.1 90 top
U23  BNO086  [LGA-28]  84.07,149.1 90 top
U24  BNO086  [LGA-28]  115.06,149.1 90 top
U$1  [#I2C#874]  35.12,11.97 90 top
U$2  [BLK889]  15.76,23.97 0 bottom
U$3  [X878]  11.37,23.99 0 top
U$4  [##INT##6]  30.96,10.31 90 bottom
U$5  [##RST##5]  28.41,10.47 90 bottom
U$6  [Y879]  8.71,27.16 0 top
U$7  [Z880]  11.88,26.54 0 top
U$8  [#SCL#4]  25.88,10.38 90 bottom
U$9  [#GND#2]  18.26,10.52 90 bottom
U$10  [Y879]  8.56,27.13 0 bottom
U$11  [#SCK#882]  18.3,28.82 90 bottom
U$12  [#SO#867]  20.84,28.95 90 top
U$13  [#SI#868]  23.37,29.26 90 top
U$14  [#SDA#3]  23.37,10.5 90 bottom
U$15  [Z880]  11.83,26.53 0 bottom
U$16  [#GND#2]  13.23,28.59 90 bottom
U$17  [##CS##870]  25.91,29.02 90 top
U$18  [##CS##885]  25.91,29.11 90 bottom
U$19  [##RST##872]  31,28.62 90 top
U$20  [##RST##887]  30.98,28.74 90 bottom
U$21  [RXI891]  23.36,23.4 90 bottom
U$22  [TXO892]  25.91,23.08 90 bottom
U$23  [#PS0#874]  13.23,10.42 90 top
U$24  [BNO0861]  9.41,10.45 90 top
U$25  [X878]  11.22,23.99 0 bottom
U$26  [#LED#0]  31.67,22.36 0 bottom
U$27  [#3V3#874]  20.82,10.5 90 bottom
U$28  [OPEN#0X4B0]  32.1,13.14 0 bottom
U$29  [QWIIC_4MM]  7.95,10.39 90 top
U$30  [#ADR#894]  33.75,16.23 0 bottom
U$31  [IMU862]  10.64,10.43 90 top
U$32  [#GND#864]  13.23,28.49 90 top
U$33  [#PS1#1]  15.72,10.25 90 bottom
U$34  [#PS0#2]  13.19,10.33 90 bottom
U$35  [#PS1#895]  10.77,15.75 0 bottom
U$36  [#3V3#865]  15.78,28.59 90 top
U$37  [#SCK#866]  18.31,28.85 90 top
U$38  [##WAK##871]  28.47,28.87 90 top
U$39  [#3V3#882]  15.74,28.59 90 bottom
U$40  [3V3891]  20.82,23.24 90 bottom
U$41  [GRN890]  28.47,23.99 0 bottom
U$42  [#PWR#873]  33.24,25.04 90 top